# EAGLE board Qwiic EEPROM-Panel (EAGLE 9.6.2), part 1 of 4
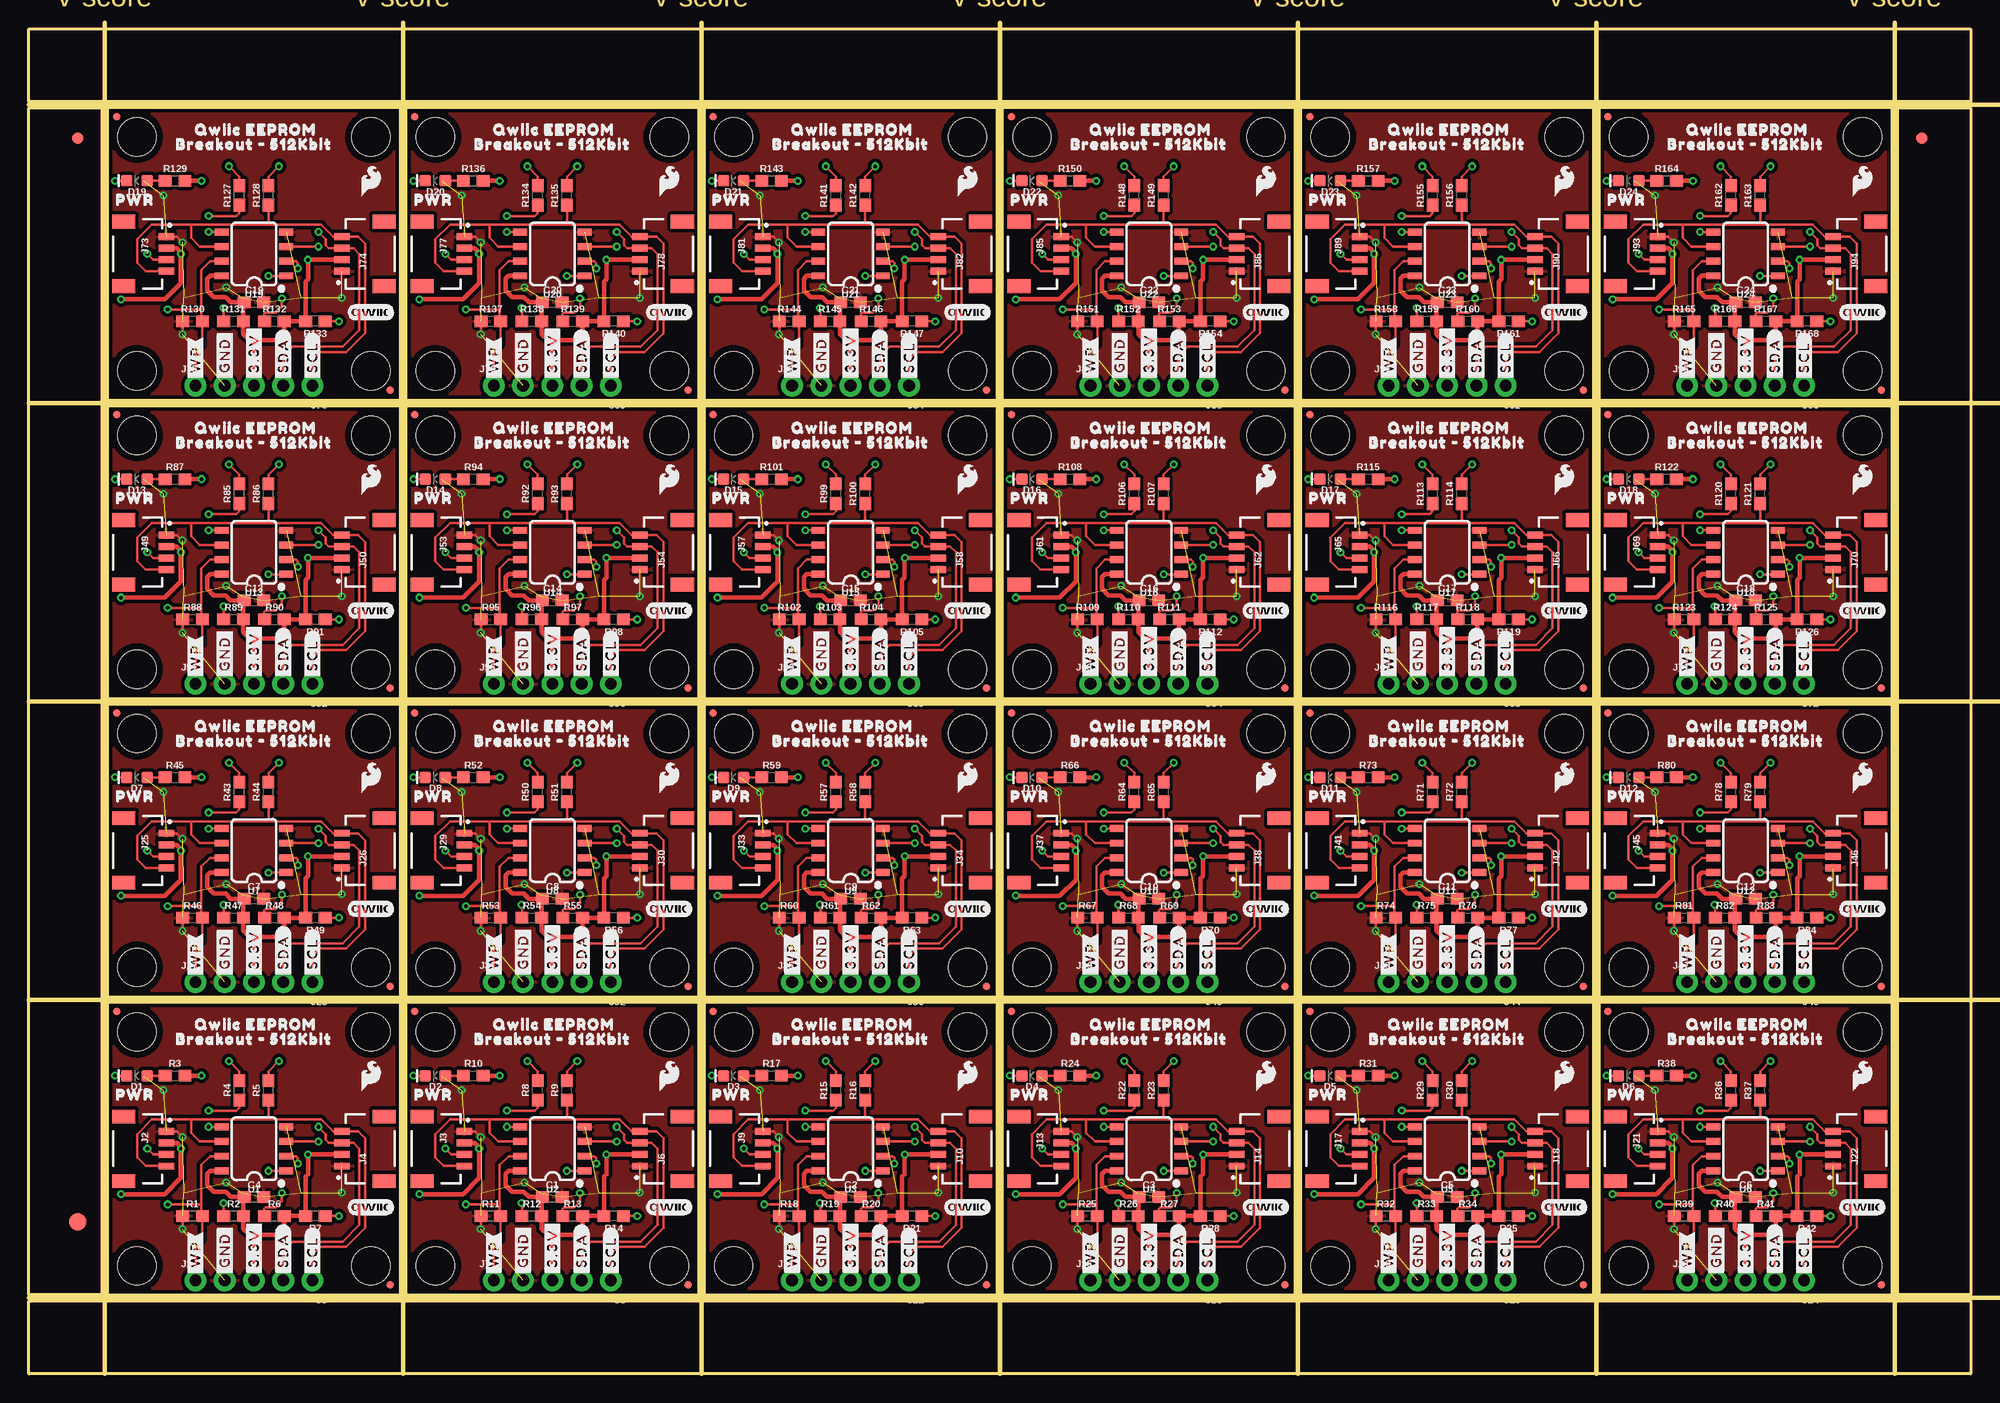
[diagram p0: board, top side]
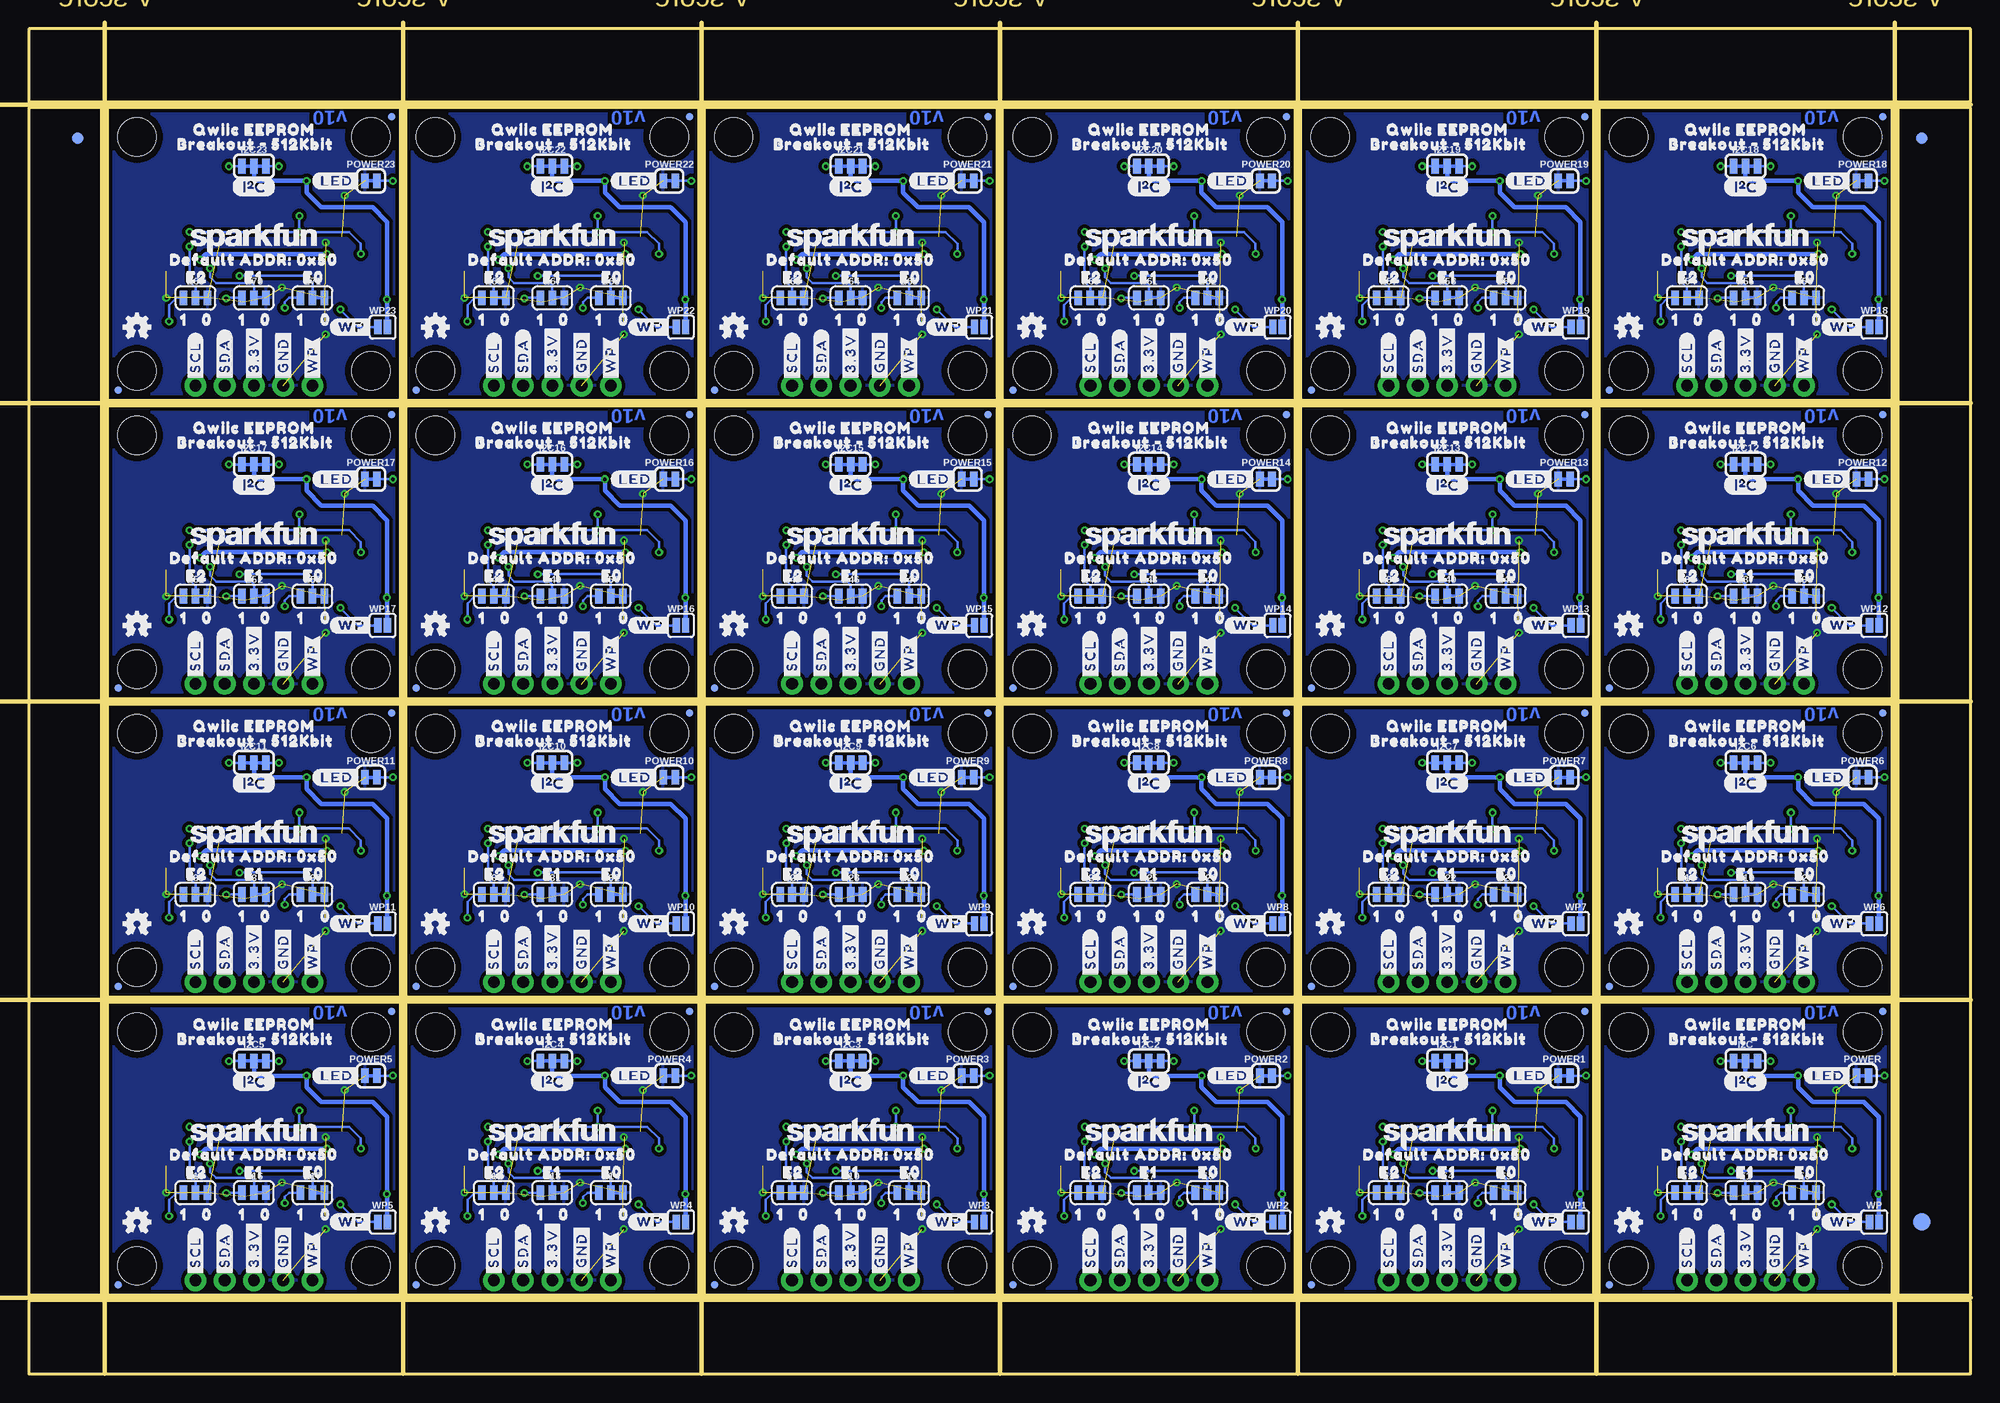
[diagram p1: board, bottom side, seen from below]

Size 168.66 x 116.84 mm. Coordinates in mm from the lower left corner, seen from the top.
Outline: 6.86,6.86 6.86,32.26 32.26,32.26 32.26,6.86 6.86,6.86
Outline: 32.77,6.86 32.77,32.26 58.17,32.26 58.17,6.86 32.77,6.86
Outline: 58.67,6.86 58.67,32.26 84.07,32.26 84.07,6.86 58.67,6.86
Outline: 84.58,6.86 84.58,32.26 109.98,32.26 109.98,6.86 84.58,6.86
Outline: 110.49,6.86 110.49,32.26 135.89,32.26 135.89,6.86 110.49,6.86
Outline: 136.4,6.86 136.4,32.26 161.8,32.26 161.8,6.86 136.4,6.86
Outline: 6.86,32.77 6.86,58.17 32.26,58.17 32.26,32.77 6.86,32.77
Outline: 32.77,32.77 32.77,58.17 58.17,58.17 58.17,32.77 32.77,32.77
Outline: 58.67,32.77 58.67,58.17 84.07,58.17 84.07,32.77 58.67,32.77
Outline: 84.58,32.77 84.58,58.17 109.98,58.17 109.98,32.77 84.58,32.77
Outline: 110.49,32.77 110.49,58.17 135.89,58.17 135.89,32.77 110.49,32.77
Outline: 136.4,32.77 136.4,58.17 161.8,58.17 161.8,32.77 136.4,32.77
Outline: 6.86,58.67 6.86,84.07 32.26,84.07 32.26,58.67 6.86,58.67
Outline: 32.77,58.67 32.77,84.07 58.17,84.07 58.17,58.67 32.77,58.67
Outline: 58.67,58.67 58.67,84.07 84.07,84.07 84.07,58.67 58.67,58.67
Outline: 84.58,58.67 84.58,84.07 109.98,84.07 109.98,58.67 84.58,58.67
Outline: 110.49,58.67 110.49,84.07 135.89,84.07 135.89,58.67 110.49,58.67
Outline: 136.4,58.67 136.4,84.07 161.8,84.07 161.8,58.67 136.4,58.67
Outline: 6.86,84.58 6.86,109.98 32.26,109.98 32.26,84.58 6.86,84.58
Outline: 32.77,84.58 32.77,109.98 58.17,109.98 58.17,84.58 32.77,84.58
Outline: 58.67,84.58 58.67,109.98 84.07,109.98 84.07,84.58 58.67,84.58
Outline: 84.58,84.58 84.58,109.98 109.98,109.98 109.98,84.58 84.58,84.58
Outline: 110.49,84.58 110.49,109.98 135.89,109.98 135.89,84.58 110.49,84.58
Outline: 136.4,84.58 136.4,109.98 161.8,109.98 161.8,84.58 136.4,84.58
Outline: 0,6.35 168.66,6.35 168.66,0 0,0 0,6.35
Outline: 162.31,109.98 168.66,109.98 168.66,6.86 162.31,6.86 162.31,109.98
Outline: 0,116.84 168.66,116.84 168.66,110.49 0,110.49 0,116.84
Outline: 0,109.98 6.35,109.98 6.35,6.86 0,6.86 0,109.98
Copper layers (1*16): Top 0.035mm / dielectric 1.5mm / Bottom 0.035mm
Design rules "Qwiic EEPROM": minimum track width 7mil, minimum drill 0.3mm, track to track 7mil, track to pad 7mil, pad to pad 7mil, via to via 7mil, smd to smd 7mil, copper to edge 7mil, drill to drill 7mil, minimum pad ring 7mil, minimum via ring 7mil, stop-mask expansion 3mil, vias tented up to drill 25mil, thermal gap 10mil
Milling: 12 lines

## Footprints (pad centres in the part's own frame; a part is rotated, then mirrored left to right if it is on the bottom)
0603 = smd 1.1 x 1: 1 -0.85,0; 2 0.85,0
LED-0603 = smd 1 x 1: A -0.877,0; C 0.877,0
SMT-JUMPER_3_1-NC_TRACE_SILK = smd 0.66 x 1.27: 1 -1.041,0; 2 0,0; 3 1.041,0
FIDUCIAL-1X2 = smd 1 x 1: 1 0,0
FIDUCIAL-1.5X3 = smd 1.5 x 1.5: 1 0,0
SMT-JUMPER_3_2-NC_TRACE_SILK = smd 0.66 x 1.27: 1 -1.041,0; 2 0,0; 3 1.041,0
1X01_NO_SILK = drill 1.016 pad 1.88: 1 0,0
JST04_1MM_RA = smd 0.6 x 1.35: 1 -1.5,0; 2 -0.5,0; 3 0.5,0; 4 1.5,0 | smd 1.2 x 2: NC1 2.8,-3.675; NC2 -2.8,-3.675
1X04_NO_SILK = drill 1.016 pad 1.88: 1 0,0; 2 2.54,0; 3 5.08,0; 4 7.62,0
FIDUCIAL-MICRO = smd 0.635 x 0.635: 1 0,0
STAND-OFF = hole 3.302: 0,0
SMT-JUMPER_2_NC_TRACE_SILK = smd 0.66 x 1.27: 1 -0.521,0; 2 0.521,0
SO08 = smd 0.6 x 1.2: 1 -1.905,-2.8; 2 -0.635,-2.8; 3 0.635,-2.8; 4 1.905,-2.8; 5 1.905,2.8; 6 0.635,2.8; 7 -0.635,2.8; 8 -1.905,2.8
SMT-JUMPER_2_NO_SILK = smd 0.635 x 1.27: 1 -0.406,0; 2 0.406,0

## Placement (x,y rotation side)
C1  0.1uF  [0603]  45.47,15.37 0 top
C2  0.1uF  [0603]  71.37,15.37 0 top
C3  0.1uF  [0603]  97.28,15.37 0 top
C4  0.1uF  [0603]  19.56,15.37 0 top
C5  0.1uF  [0603]  123.19,15.37 0 top
C6  0.1uF  [0603]  149.1,15.37 0 top
C7  0.1uF  [0603]  19.56,41.27 0 top
C8  0.1uF  [0603]  45.47,41.27 0 top
C9  0.1uF  [0603]  71.37,41.27 0 top
C10  0.1uF  [0603]  97.28,41.27 0 top
C11  0.1uF  [0603]  123.19,41.27 0 top
C12  0.1uF  [0603]  149.1,41.27 0 top
C13  0.1uF  [0603]  19.56,67.18 0 top
C14  0.1uF  [0603]  45.47,67.18 0 top
C15  0.1uF  [0603]  71.37,67.18 0 top
C16  0.1uF  [0603]  97.28,67.18 0 top
C17  0.1uF  [0603]  123.19,67.18 0 top
C18  0.1uF  [0603]  149.1,67.18 0 top
C19  0.1uF  [0603]  19.56,93.09 0 top
C20  0.1uF  [0603]  45.47,93.09 0 top
C21  0.1uF  [0603]  71.37,93.09 0 top
C22  0.1uF  [0603]  97.28,93.09 0 top
C23  0.1uF  [0603]  123.19,93.09 0 top
C24  0.1uF  [0603]  149.1,93.09 0 top
D1  RED  [LED-0603]  9.4,25.91 180 top
D2  RED  [LED-0603]  35.31,25.91 180 top
D3  RED  [LED-0603]  61.21,25.91 180 top
D4  RED  [LED-0603]  87.12,25.91 180 top
D5  RED  [LED-0603]  113.03,25.91 180 top
D6  RED  [LED-0603]  138.94,25.91 180 top
D7  RED  [LED-0603]  9.4,51.82 180 top
D8  RED  [LED-0603]  35.31,51.82 180 top
D9  RED  [LED-0603]  61.21,51.82 180 top
D10  RED  [LED-0603]  87.12,51.82 180 top
D11  RED  [LED-0603]  113.03,51.82 180 top
D12  RED  [LED-0603]  138.94,51.82 180 top
D13  RED  [LED-0603]  9.4,77.72 180 top
D14  RED  [LED-0603]  35.31,77.72 180 top
D15  RED  [LED-0603]  61.21,77.72 180 top
D16  RED  [LED-0603]  87.12,77.72 180 top
D17  RED  [LED-0603]  113.03,77.72 180 top
D18  RED  [LED-0603]  138.94,77.72 180 top
D19  RED  [LED-0603]  9.4,103.63 180 top
D20  RED  [LED-0603]  35.31,103.63 180 top
D21  RED  [LED-0603]  61.21,103.63 180 top
D22  RED  [LED-0603]  87.12,103.63 180 top
D23  RED  [LED-0603]  113.03,103.63 180 top
D24  RED  [LED-0603]  138.94,103.63 180 top
E0  JUMPER-SMT_3_1-NC_TRACE_SILK  [SMT-JUMPER_3_1-NC_TRACE_SILK]  14.48,15.75 0 bottom
E1  JUMPER-SMT_3_1-NC_TRACE_SILK  [SMT-JUMPER_3_1-NC_TRACE_SILK]  19.56,15.75 0 bottom
E2  JUMPER-SMT_3_1-NC_TRACE_SILK  [SMT-JUMPER_3_1-NC_TRACE_SILK]  24.64,15.75 0 bottom
E3  JUMPER-SMT_3_1-NC_TRACE_SILK  [SMT-JUMPER_3_1-NC_TRACE_SILK]  50.55,15.75 0 bottom
E4  JUMPER-SMT_3_1-NC_TRACE_SILK  [SMT-JUMPER_3_1-NC_TRACE_SILK]  45.47,15.75 0 bottom
E5  JUMPER-SMT_3_1-NC_TRACE_SILK  [SMT-JUMPER_3_1-NC_TRACE_SILK]  40.39,15.75 0 bottom
E6  JUMPER-SMT_3_1-NC_TRACE_SILK  [SMT-JUMPER_3_1-NC_TRACE_SILK]  76.45,15.75 0 bottom
E7  JUMPER-SMT_3_1-NC_TRACE_SILK  [SMT-JUMPER_3_1-NC_TRACE_SILK]  71.37,15.75 0 bottom
E8  JUMPER-SMT_3_1-NC_TRACE_SILK  [SMT-JUMPER_3_1-NC_TRACE_SILK]  66.29,15.75 0 bottom
E9  JUMPER-SMT_3_1-NC_TRACE_SILK  [SMT-JUMPER_3_1-NC_TRACE_SILK]  102.36,15.75 0 bottom
E10  JUMPER-SMT_3_1-NC_TRACE_SILK  [SMT-JUMPER_3_1-NC_TRACE_SILK]  97.28,15.75 0 bottom
E11  JUMPER-SMT_3_1-NC_TRACE_SILK  [SMT-JUMPER_3_1-NC_TRACE_SILK]  92.2,15.75 0 bottom
E12  JUMPER-SMT_3_1-NC_TRACE_SILK  [SMT-JUMPER_3_1-NC_TRACE_SILK]  128.27,15.75 0 bottom
E13  JUMPER-SMT_3_1-NC_TRACE_SILK  [SMT-JUMPER_3_1-NC_TRACE_SILK]  123.19,15.75 0 bottom
E14  JUMPER-SMT_3_1-NC_TRACE_SILK  [SMT-JUMPER_3_1-NC_TRACE_SILK]  118.11,15.75 0 bottom
E15  JUMPER-SMT_3_1-NC_TRACE_SILK  [SMT-JUMPER_3_1-NC_TRACE_SILK]  154.18,15.75 0 bottom
E16  JUMPER-SMT_3_1-NC_TRACE_SILK  [SMT-JUMPER_3_1-NC_TRACE_SILK]  149.1,15.75 0 bottom
E17  JUMPER-SMT_3_1-NC_TRACE_SILK  [SMT-JUMPER_3_1-NC_TRACE_SILK]  144.02,15.75 0 bottom
E18  JUMPER-SMT_3_1-NC_TRACE_SILK  [SMT-JUMPER_3_1-NC_TRACE_SILK]  24.64,41.66 0 bottom
E19  JUMPER-SMT_3_1-NC_TRACE_SILK  [SMT-JUMPER_3_1-NC_TRACE_SILK]  19.56,41.66 0 bottom
E20  JUMPER-SMT_3_1-NC_TRACE_SILK  [SMT-JUMPER_3_1-NC_TRACE_SILK]  14.48,41.66 0 bottom
E21  JUMPER-SMT_3_1-NC_TRACE_SILK  [SMT-JUMPER_3_1-NC_TRACE_SILK]  50.55,41.66 0 bottom
E22  JUMPER-SMT_3_1-NC_TRACE_SILK  [SMT-JUMPER_3_1-NC_TRACE_SILK]  45.47,41.66 0 bottom
E23  JUMPER-SMT_3_1-NC_TRACE_SILK  [SMT-JUMPER_3_1-NC_TRACE_SILK]  40.39,41.66 0 bottom
E24  JUMPER-SMT_3_1-NC_TRACE_SILK  [SMT-JUMPER_3_1-NC_TRACE_SILK]  76.45,41.66 0 bottom
E25  JUMPER-SMT_3_1-NC_TRACE_SILK  [SMT-JUMPER_3_1-NC_TRACE_SILK]  71.37,41.66 0 bottom
E26  JUMPER-SMT_3_1-NC_TRACE_SILK  [SMT-JUMPER_3_1-NC_TRACE_SILK]  66.29,41.66 0 bottom
E27  JUMPER-SMT_3_1-NC_TRACE_SILK  [SMT-JUMPER_3_1-NC_TRACE_SILK]  102.36,41.66 0 bottom
E28  JUMPER-SMT_3_1-NC_TRACE_SILK  [SMT-JUMPER_3_1-NC_TRACE_SILK]  97.28,41.66 0 bottom
E29  JUMPER-SMT_3_1-NC_TRACE_SILK  [SMT-JUMPER_3_1-NC_TRACE_SILK]  92.2,41.66 0 bottom
E30  JUMPER-SMT_3_1-NC_TRACE_SILK  [SMT-JUMPER_3_1-NC_TRACE_SILK]  128.27,41.66 0 bottom
E31  JUMPER-SMT_3_1-NC_TRACE_SILK  [SMT-JUMPER_3_1-NC_TRACE_SILK]  123.19,41.66 0 bottom
E32  JUMPER-SMT_3_1-NC_TRACE_SILK  [SMT-JUMPER_3_1-NC_TRACE_SILK]  118.11,41.66 0 bottom
E33  JUMPER-SMT_3_1-NC_TRACE_SILK  [SMT-JUMPER_3_1-NC_TRACE_SILK]  154.18,41.66 0 bottom
E34  JUMPER-SMT_3_1-NC_TRACE_SILK  [SMT-JUMPER_3_1-NC_TRACE_SILK]  149.1,41.66 0 bottom
E35  JUMPER-SMT_3_1-NC_TRACE_SILK  [SMT-JUMPER_3_1-NC_TRACE_SILK]  144.02,41.66 0 bottom
E36  JUMPER-SMT_3_1-NC_TRACE_SILK  [SMT-JUMPER_3_1-NC_TRACE_SILK]  24.64,67.56 0 bottom
E37  JUMPER-SMT_3_1-NC_TRACE_SILK  [SMT-JUMPER_3_1-NC_TRACE_SILK]  19.56,67.56 0 bottom
E38  JUMPER-SMT_3_1-NC_TRACE_SILK  [SMT-JUMPER_3_1-NC_TRACE_SILK]  14.48,67.56 0 bottom
E39  JUMPER-SMT_3_1-NC_TRACE_SILK  [SMT-JUMPER_3_1-NC_TRACE_SILK]  50.55,67.56 0 bottom
E40  JUMPER-SMT_3_1-NC_TRACE_SILK  [SMT-JUMPER_3_1-NC_TRACE_SILK]  45.47,67.56 0 bottom
E41  JUMPER-SMT_3_1-NC_TRACE_SILK  [SMT-JUMPER_3_1-NC_TRACE_SILK]  40.39,67.56 0 bottom
E42  JUMPER-SMT_3_1-NC_TRACE_SILK  [SMT-JUMPER_3_1-NC_TRACE_SILK]  76.45,67.56 0 bottom
E43  JUMPER-SMT_3_1-NC_TRACE_SILK  [SMT-JUMPER_3_1-NC_TRACE_SILK]  71.37,67.56 0 bottom
E44  JUMPER-SMT_3_1-NC_TRACE_SILK  [SMT-JUMPER_3_1-NC_TRACE_SILK]  66.29,67.56 0 bottom
E45  JUMPER-SMT_3_1-NC_TRACE_SILK  [SMT-JUMPER_3_1-NC_TRACE_SILK]  102.36,67.56 0 bottom
E46  JUMPER-SMT_3_1-NC_TRACE_SILK  [SMT-JUMPER_3_1-NC_TRACE_SILK]  97.28,67.56 0 bottom
E47  JUMPER-SMT_3_1-NC_TRACE_SILK  [SMT-JUMPER_3_1-NC_TRACE_SILK]  92.2,67.56 0 bottom
E48  JUMPER-SMT_3_1-NC_TRACE_SILK  [SMT-JUMPER_3_1-NC_TRACE_SILK]  128.27,67.56 0 bottom
E49  JUMPER-SMT_3_1-NC_TRACE_SILK  [SMT-JUMPER_3_1-NC_TRACE_SILK]  123.19,67.56 0 bottom
E50  JUMPER-SMT_3_1-NC_TRACE_SILK  [SMT-JUMPER_3_1-NC_TRACE_SILK]  118.11,67.56 0 bottom
E51  JUMPER-SMT_3_1-NC_TRACE_SILK  [SMT-JUMPER_3_1-NC_TRACE_SILK]  154.18,67.56 0 bottom
E52  JUMPER-SMT_3_1-NC_TRACE_SILK  [SMT-JUMPER_3_1-NC_TRACE_SILK]  149.1,67.56 0 bottom
E53  JUMPER-SMT_3_1-NC_TRACE_SILK  [SMT-JUMPER_3_1-NC_TRACE_SILK]  144.02,67.56 0 bottom
E54  JUMPER-SMT_3_1-NC_TRACE_SILK  [SMT-JUMPER_3_1-NC_TRACE_SILK]  24.64,93.47 0 bottom
E55  JUMPER-SMT_3_1-NC_TRACE_SILK  [SMT-JUMPER_3_1-NC_TRACE_SILK]  19.56,93.47 0 bottom
E56  JUMPER-SMT_3_1-NC_TRACE_SILK  [SMT-JUMPER_3_1-NC_TRACE_SILK]  14.48,93.47 0 bottom
E57  JUMPER-SMT_3_1-NC_TRACE_SILK  [SMT-JUMPER_3_1-NC_TRACE_SILK]  50.55,93.47 0 bottom
E58  JUMPER-SMT_3_1-NC_TRACE_SILK  [SMT-JUMPER_3_1-NC_TRACE_SILK]  45.47,93.47 0 bottom
E59  JUMPER-SMT_3_1-NC_TRACE_SILK  [SMT-JUMPER_3_1-NC_TRACE_SILK]  40.39,93.47 0 bottom
E60  JUMPER-SMT_3_1-NC_TRACE_SILK  [SMT-JUMPER_3_1-NC_TRACE_SILK]  76.45,93.47 0 bottom
E61  JUMPER-SMT_3_1-NC_TRACE_SILK  [SMT-JUMPER_3_1-NC_TRACE_SILK]  71.37,93.47 0 bottom
E62  JUMPER-SMT_3_1-NC_TRACE_SILK  [SMT-JUMPER_3_1-NC_TRACE_SILK]  66.29,93.47 0 bottom
E63  JUMPER-SMT_3_1-NC_TRACE_SILK  [SMT-JUMPER_3_1-NC_TRACE_SILK]  102.36,93.47 0 bottom
E64  JUMPER-SMT_3_1-NC_TRACE_SILK  [SMT-JUMPER_3_1-NC_TRACE_SILK]  97.28,93.47 0 bottom
E65  JUMPER-SMT_3_1-NC_TRACE_SILK  [SMT-JUMPER_3_1-NC_TRACE_SILK]  92.2,93.47 0 bottom
E66  JUMPER-SMT_3_1-NC_TRACE_SILK  [SMT-JUMPER_3_1-NC_TRACE_SILK]  128.27,93.47 0 bottom
E67  JUMPER-SMT_3_1-NC_TRACE_SILK  [SMT-JUMPER_3_1-NC_TRACE_SILK]  123.19,93.47 0 bottom
E68  JUMPER-SMT_3_1-NC_TRACE_SILK  [SMT-JUMPER_3_1-NC_TRACE_SILK]  118.11,93.47 0 bottom
E69  JUMPER-SMT_3_1-NC_TRACE_SILK  [SMT-JUMPER_3_1-NC_TRACE_SILK]  154.18,93.47 0 bottom
E70  JUMPER-SMT_3_1-NC_TRACE_SILK  [SMT-JUMPER_3_1-NC_TRACE_SILK]  149.1,93.47 0 bottom
E71  JUMPER-SMT_3_1-NC_TRACE_SILK  [SMT-JUMPER_3_1-NC_TRACE_SILK]  144.02,93.47 0 bottom
E$1  [FIDUCIAL-1X2]  4.23,107.31 0 top
E$2  [FIDUCIAL-1X2]  4.23,107.31 0 bottom
E$3  [FIDUCIAL-1X2]  164.42,107.31 0 top
E$4  [FIDUCIAL-1X2]  164.42,107.31 0 bottom
E$5  [FIDUCIAL-1.5X3]  4.23,13.21 0 top
E$6  [FIDUCIAL-1.5X3]  4.23,13.21 0 bottom
I2C  JUMPER-SMT_3_2-NC_TRACE_SILK  [SMT-JUMPER_3_2-NC_TRACE_SILK]  19.56,27.18 0 bottom
I2C1  JUMPER-SMT_3_2-NC_TRACE_SILK  [SMT-JUMPER_3_2-NC_TRACE_SILK]  45.47,27.18 0 bottom
I2C2  JUMPER-SMT_3_2-NC_TRACE_SILK  [SMT-JUMPER_3_2-NC_TRACE_SILK]  71.37,27.18 0 bottom
I2C3  JUMPER-SMT_3_2-NC_TRACE_SILK  [SMT-JUMPER_3_2-NC_TRACE_SILK]  97.28,27.18 0 bottom
I2C4  JUMPER-SMT_3_2-NC_TRACE_SILK  [SMT-JUMPER_3_2-NC_TRACE_SILK]  123.19,27.18 0 bottom
I2C5  JUMPER-SMT_3_2-NC_TRACE_SILK  [SMT-JUMPER_3_2-NC_TRACE_SILK]  149.1,27.18 0 bottom
I2C6  JUMPER-SMT_3_2-NC_TRACE_SILK  [SMT-JUMPER_3_2-NC_TRACE_SILK]  19.56,53.09 0 bottom
I2C7  JUMPER-SMT_3_2-NC_TRACE_SILK  [SMT-JUMPER_3_2-NC_TRACE_SILK]  45.47,53.09 0 bottom
I2C8  JUMPER-SMT_3_2-NC_TRACE_SILK  [SMT-JUMPER_3_2-NC_TRACE_SILK]  71.37,53.09 0 bottom
I2C9  JUMPER-SMT_3_2-NC_TRACE_SILK  [SMT-JUMPER_3_2-NC_TRACE_SILK]  97.28,53.09 0 bottom
I2C10  JUMPER-SMT_3_2-NC_TRACE_SILK  [SMT-JUMPER_3_2-NC_TRACE_SILK]  123.19,53.09 0 bottom
I2C11  JUMPER-SMT_3_2-NC_TRACE_SILK  [SMT-JUMPER_3_2-NC_TRACE_SILK]  149.1,53.09 0 bottom
I2C12  JUMPER-SMT_3_2-NC_TRACE_SILK  [SMT-JUMPER_3_2-NC_TRACE_SILK]  19.56,78.99 0 bottom
I2C13  JUMPER-SMT_3_2-NC_TRACE_SILK  [SMT-JUMPER_3_2-NC_TRACE_SILK]  45.47,78.99 0 bottom
I2C14  JUMPER-SMT_3_2-NC_TRACE_SILK  [SMT-JUMPER_3_2-NC_TRACE_SILK]  71.37,78.99 0 bottom
I2C15  JUMPER-SMT_3_2-NC_TRACE_SILK  [SMT-JUMPER_3_2-NC_TRACE_SILK]  97.28,78.99 0 bottom
I2C16  JUMPER-SMT_3_2-NC_TRACE_SILK  [SMT-JUMPER_3_2-NC_TRACE_SILK]  123.19,78.99 0 bottom
I2C17  JUMPER-SMT_3_2-NC_TRACE_SILK  [SMT-JUMPER_3_2-NC_TRACE_SILK]  149.1,78.99 0 bottom
I2C18  JUMPER-SMT_3_2-NC_TRACE_SILK  [SMT-JUMPER_3_2-NC_TRACE_SILK]  19.56,104.9 0 bottom
I2C19  JUMPER-SMT_3_2-NC_TRACE_SILK  [SMT-JUMPER_3_2-NC_TRACE_SILK]  45.47,104.9 0 bottom
I2C20  JUMPER-SMT_3_2-NC_TRACE_SILK  [SMT-JUMPER_3_2-NC_TRACE_SILK]  71.37,104.9 0 bottom
I2C21  JUMPER-SMT_3_2-NC_TRACE_SILK  [SMT-JUMPER_3_2-NC_TRACE_SILK]  97.28,104.9 0 bottom
I2C22  JUMPER-SMT_3_2-NC_TRACE_SILK  [SMT-JUMPER_3_2-NC_TRACE_SILK]  123.19,104.9 0 bottom
I2C23  JUMPER-SMT_3_2-NC_TRACE_SILK  [SMT-JUMPER_3_2-NC_TRACE_SILK]  149.1,104.9 0 bottom
J1  [1X01_NO_SILK]  14.48,8.13 0 top
J2  QWIIC_RA  [JST04_1MM_RA]  11.94,19.56 270 top
J3  QWIIC_RA  [JST04_1MM_RA]  37.85,19.56 270 top
J4  QWIIC_RA  [JST04_1MM_RA]  27.18,19.56 90 top
J5  [1X04_NO_SILK]  24.64,8.13 180 top
J6  QWIIC_RA  [JST04_1MM_RA]  53.09,19.56 90 top
J7  [1X01_NO_SILK]  40.39,8.13 0 top
J8  [1X04_NO_SILK]  50.55,8.13 180 top
J9  QWIIC_RA  [JST04_1MM_RA]  63.75,19.56 270 top
J10  QWIIC_RA  [JST04_1MM_RA]  78.99,19.56 90 top
J11  [1X01_NO_SILK]  66.29,8.13 0 top
J12  [1X04_NO_SILK]  76.45,8.13 180 top
J13  QWIIC_RA  [JST04_1MM_RA]  89.66,19.56 270 top
J14  QWIIC_RA  [JST04_1MM_RA]  104.9,19.56 90 top
J15  [1X01_NO_SILK]  92.2,8.13 0 top
J16  [1X04_NO_SILK]  102.36,8.13 180 top
J17  QWIIC_RA  [JST04_1MM_RA]  115.57,19.56 270 top
J18  QWIIC_RA  [JST04_1MM_RA]  130.81,19.56 90 top
J19  [1X01_NO_SILK]  118.11,8.13 0 top
J20  [1X04_NO_SILK]  128.27,8.13 180 top
J21  QWIIC_RA  [JST04_1MM_RA]  141.48,19.56 270 top
J22  QWIIC_RA  [JST04_1MM_RA]  156.72,19.56 90 top
J23  [1X01_NO_SILK]  144.02,8.13 0 top
J24  [1X04_NO_SILK]  154.18,8.13 180 top
J25  QWIIC_RA  [JST04_1MM_RA]  11.94,45.47 270 top
J26  QWIIC_RA  [JST04_1MM_RA]  27.18,45.47 90 top
J27  [1X01_NO_SILK]  14.48,34.04 0 top
J28  [1X04_NO_SILK]  24.64,34.04 180 top
J29  QWIIC_RA  [JST04_1MM_RA]  37.85,45.47 270 top
J30  QWIIC_RA  [JST04_1MM_RA]  53.09,45.47 90 top
J31  [1X01_NO_SILK]  40.39,34.04 0 top
J32  [1X04_NO_SILK]  50.55,34.04 180 top
J33  QWIIC_RA  [JST04_1MM_RA]  63.75,45.47 270 top
J34  QWIIC_RA  [JST04_1MM_RA]  78.99,45.47 90 top
J35  [1X01_NO_SILK]  66.29,34.04 0 top
J36  [1X04_NO_SILK]  76.45,34.04 180 top
J37  QWIIC_RA  [JST04_1MM_RA]  89.66,45.47 270 top
J38  QWIIC_RA  [JST04_1MM_RA]  104.9,45.47 90 top
J39  [1X01_NO_SILK]  92.2,34.04 0 top
J40  [1X04_NO_SILK]  102.36,34.04 180 top
J41  QWIIC_RA  [JST04_1MM_RA]  115.57,45.47 270 top
J42  QWIIC_RA  [JST04_1MM_RA]  130.81,45.47 90 top
J43  [1X01_NO_SILK]  118.11,34.04 0 top
J44  [1X04_NO_SILK]  128.27,34.04 180 top
J45  QWIIC_RA  [JST04_1MM_RA]  141.48,45.47 270 top
J46  QWIIC_RA  [JST04_1MM_RA]  156.72,45.47 90 top
J47  [1X01_NO_SILK]  144.02,34.04 0 top
J48  [1X04_NO_SILK]  154.18,34.04 180 top
J49  QWIIC_RA  [JST04_1MM_RA]  11.94,71.37 270 top
J50  QWIIC_RA  [JST04_1MM_RA]  27.18,71.37 90 top
J51  [1X01_NO_SILK]  14.48,59.94 0 top
J52  [1X04_NO_SILK]  24.64,59.94 180 top
J53  QWIIC_RA  [JST04_1MM_RA]  37.85,71.37 270 top
J54  QWIIC_RA  [JST04_1MM_RA]  53.09,71.37 90 top
J55  [1X01_NO_SILK]  40.39,59.94 0 top
J56  [1X04_NO_SILK]  50.55,59.94 180 top
J57  QWIIC_RA  [JST04_1MM_RA]  63.75,71.37 270 top
J58  QWIIC_RA  [JST04_1MM_RA]  78.99,71.37 90 top
J59  [1X01_NO_SILK]  66.29,59.94 0 top
J60  [1X04_NO_SILK]  76.45,59.94 180 top
J61  QWIIC_RA  [JST04_1MM_RA]  89.66,71.37 270 top
J62  QWIIC_RA  [JST04_1MM_RA]  104.9,71.37 90 top
J63  [1X01_NO_SILK]  92.2,59.94 0 top
J64  [1X04_NO_SILK]  102.36,59.94 180 top
J65  QWIIC_RA  [JST04_1MM_RA]  115.57,71.37 270 top
J66  QWIIC_RA  [JST04_1MM_RA]  130.81,71.37 90 top
J67  [1X01_NO_SILK]  118.11,59.94 0 top
J68  [1X04_NO_SILK]  128.27,59.94 180 top
J69  QWIIC_RA  [JST04_1MM_RA]  141.48,71.37 270 top
J70  QWIIC_RA  [JST04_1MM_RA]  156.72,71.37 90 top
J71  [1X01_NO_SILK]  144.02,59.94 0 top
J72  [1X04_NO_SILK]  154.18,59.94 180 top
J73  QWIIC_RA  [JST04_1MM_RA]  11.94,97.28 270 top
J74  QWIIC_RA  [JST04_1MM_RA]  27.18,97.28 90 top
J75  [1X01_NO_SILK]  14.48,85.85 0 top
J76  [1X04_NO_SILK]  24.64,85.85 180 top
J77  QWIIC_RA  [JST04_1MM_RA]  37.85,97.28 270 top
J78  QWIIC_RA  [JST04_1MM_RA]  53.09,97.28 90 top
J79  [1X01_NO_SILK]  40.39,85.85 0 top
J80  [1X04_NO_SILK]  50.55,85.85 180 top
J81  QWIIC_RA  [JST04_1MM_RA]  63.75,97.28 270 top
J82  QWIIC_RA  [JST04_1MM_RA]  78.99,97.28 90 top
J83  [1X01_NO_SILK]  66.29,85.85 0 top
J84  [1X04_NO_SILK]  76.45,85.85 180 top
J85  QWIIC_RA  [JST04_1MM_RA]  89.66,97.28 270 top
J86  QWIIC_RA  [JST04_1MM_RA]  104.9,97.28 90 top
J87  [1X01_NO_SILK]  92.2,85.85 0 top
J88  [1X04_NO_SILK]  102.36,85.85 180 top
J89  QWIIC_RA  [JST04_1MM_RA]  115.57,97.28 270 top
J90  QWIIC_RA  [JST04_1MM_RA]  130.81,97.28 90 top
J91  [1X01_NO_SILK]  118.11,85.85 0 top
J92  [1X04_NO_SILK]  128.27,85.85 180 top
J93  QWIIC_RA  [JST04_1MM_RA]  141.48,97.28 270 top
J94  QWIIC_RA  [JST04_1MM_RA]  156.72,97.28 90 top
J95  [1X01_NO_SILK]  144.02,85.85 0 top
J96  [1X04_NO_SILK]  154.18,85.85 180 top
JP1  FIDUCIALUFIDUCIAL  [FIDUCIAL-MICRO]  7.62,31.5 0 bottom
JP2  FIDUCIALUFIDUCIAL  [FIDUCIAL-MICRO]  31.37,7.75 0 top
JP3  STAND-OFF  [STAND-OFF]  9.4,29.72 0 top
JP4  STAND-OFF  [STAND-OFF]  29.72,29.72 0 top
JP5  FIDUCIALUFIDUCIAL  [FIDUCIAL-MICRO]  31.37,7.75 0 bottom
JP6  FIDUCIALUFIDUCIAL  [FIDUCIAL-MICRO]  7.62,31.5 0 top
JP7  STAND-OFF  [STAND-OFF]  9.4,9.4 0 top
JP8  STAND-OFF  [STAND-OFF]  29.72,9.4 0 top
JP9  STAND-OFF  [STAND-OFF]  35.31,29.72 0 top
JP10  STAND-OFF  [STAND-OFF]  55.63,29.72 0 top
JP11  FIDUCIALUFIDUCIAL  [FIDUCIAL-MICRO]  57.28,7.75 0 top
JP12  FIDUCIALUFIDUCIAL  [FIDUCIAL-MICRO]  33.53,31.5 0 top
JP13  FIDUCIALUFIDUCIAL  [FIDUCIAL-MICRO]  33.53,31.5 0 bottom
JP14  FIDUCIALUFIDUCIAL  [FIDUCIAL-MICRO]  57.28,7.75 0 bottom
JP15  STAND-OFF  [STAND-OFF]  35.31,9.4 0 top
JP16  STAND-OFF  [STAND-OFF]  55.63,9.4 0 top
JP17  STAND-OFF  [STAND-OFF]  61.21,29.72 0 top
JP18  STAND-OFF  [STAND-OFF]  81.53,29.72 0 top
JP19  FIDUCIALUFIDUCIAL  [FIDUCIAL-MICRO]  83.19,7.75 0 top
JP20  FIDUCIALUFIDUCIAL  [FIDUCIAL-MICRO]  59.44,31.5 0 top
JP21  FIDUCIALUFIDUCIAL  [FIDUCIAL-MICRO]  59.44,31.5 0 bottom
JP22  FIDUCIALUFIDUCIAL  [FIDUCIAL-MICRO]  83.19,7.75 0 bottom
JP23  STAND-OFF  [STAND-OFF]  61.21,9.4 0 top
JP24  STAND-OFF  [STAND-OFF]  81.53,9.4 0 top
JP25  STAND-OFF  [STAND-OFF]  87.12,29.72 0 top
JP26  STAND-OFF  [STAND-OFF]  107.44,29.72 0 top
JP27  FIDUCIALUFIDUCIAL  [FIDUCIAL-MICRO]  109.09,7.75 0 top
JP28  FIDUCIALUFIDUCIAL  [FIDUCIAL-MICRO]  85.34,31.5 0 top
JP29  FIDUCIALUFIDUCIAL  [FIDUCIAL-MICRO]  85.34,31.5 0 bottom
JP30  FIDUCIALUFIDUCIAL  [FIDUCIAL-MICRO]  109.09,7.75 0 bottom
JP31  STAND-OFF  [STAND-OFF]  87.12,9.4 0 top
JP32  STAND-OFF  [STAND-OFF]  107.44,9.4 0 top
JP33  STAND-OFF  [STAND-OFF]  113.03,29.72 0 top
JP34  STAND-OFF  [STAND-OFF]  133.35,29.72 0 top
JP35  FIDUCIALUFIDUCIAL  [FIDUCIAL-MICRO]  135,7.75 0 top
JP36  FIDUCIALUFIDUCIAL  [FIDUCIAL-MICRO]  111.25,31.5 0 top
JP37  FIDUCIALUFIDUCIAL  [FIDUCIAL-MICRO]  111.25,31.5 0 bottom
JP38  FIDUCIALUFIDUCIAL  [FIDUCIAL-MICRO]  135,7.75 0 bottom
JP39  STAND-OFF  [STAND-OFF]  113.03,9.4 0 top
JP40  STAND-OFF  [STAND-OFF]  133.35,9.4 0 top
JP41  STAND-OFF  [STAND-OFF]  138.94,29.72 0 top
JP42  STAND-OFF  [STAND-OFF]  159.26,29.72 0 top
JP43  FIDUCIALUFIDUCIAL  [FIDUCIAL-MICRO]  160.91,7.75 0 top
JP44  FIDUCIALUFIDUCIAL  [FIDUCIAL-MICRO]  137.16,31.5 0 top
JP45  FIDUCIALUFIDUCIAL  [FIDUCIAL-MICRO]  137.16,31.5 0 bottom
JP46  FIDUCIALUFIDUCIAL  [FIDUCIAL-MICRO]  160.91,7.75 0 bottom
JP47  STAND-OFF  [STAND-OFF]  138.94,9.4 0 top
JP48  STAND-OFF  [STAND-OFF]  159.26,9.4 0 top
JP49  STAND-OFF  [STAND-OFF]  9.4,55.63 0 top
JP50  STAND-OFF  [STAND-OFF]  29.72,55.63 0 top
JP51  FIDUCIALUFIDUCIAL  [FIDUCIAL-MICRO]  31.37,33.66 0 top
JP52  FIDUCIALUFIDUCIAL  [FIDUCIAL-MICRO]  7.62,57.4 0 top
JP53  FIDUCIALUFIDUCIAL  [FIDUCIAL-MICRO]  7.62,57.4 0 bottom
JP54  FIDUCIALUFIDUCIAL  [FIDUCIAL-MICRO]  31.37,33.66 0 bottom
JP55  STAND-OFF  [STAND-OFF]  9.4,35.31 0 top
JP56  STAND-OFF  [STAND-OFF]  29.72,35.31 0 top
JP57  STAND-OFF  [STAND-OFF]  35.31,55.63 0 top
JP58  STAND-OFF  [STAND-OFF]  55.63,55.63 0 top
JP59  FIDUCIALUFIDUCIAL  [FIDUCIAL-MICRO]  57.28,33.66 0 top
JP60  FIDUCIALUFIDUCIAL  [FIDUCIAL-MICRO]  33.53,57.4 0 top
JP61  FIDUCIALUFIDUCIAL  [FIDUCIAL-MICRO]  33.53,57.4 0 bottom
JP62  FIDUCIALUFIDUCIAL  [FIDUCIAL-MICRO]  57.28,33.66 0 bottom
JP63  STAND-OFF  [STAND-OFF]  35.31,35.31 0 top
JP64  STAND-OFF  [STAND-OFF]  55.63,35.31 0 top
JP65  STAND-OFF  [STAND-OFF]  61.21,55.63 0 top
JP66  STAND-OFF  [STAND-OFF]  81.53,55.63 0 top
JP67  FIDUCIALUFIDUCIAL  [FIDUCIAL-MICRO]  83.19,33.66 0 top
JP68  FIDUCIALUFIDUCIAL  [FIDUCIAL-MICRO]  59.44,57.4 0 top
JP69  FIDUCIALUFIDUCIAL  [FIDUCIAL-MICRO]  59.44,57.4 0 bottom
JP70  FIDUCIALUFIDUCIAL  [FIDUCIAL-MICRO]  83.19,33.66 0 bottom
JP71  STAND-OFF  [STAND-OFF]  61.21,35.31 0 top
JP72  STAND-OFF  [STAND-OFF]  81.53,35.31 0 top
JP73  STAND-OFF  [STAND-OFF]  87.12,55.63 0 top
JP74  STAND-OFF  [STAND-OFF]  107.44,55.63 0 top
JP75  FIDUCIALUFIDUCIAL  [FIDUCIAL-MICRO]  109.09,33.66 0 top
JP76  FIDUCIALUFIDUCIAL  [FIDUCIAL-MICRO]  85.34,57.4 0 top
JP77  FIDUCIALUFIDUCIAL  [FIDUCIAL-MICRO]  85.34,57.4 0 bottom
JP78  FIDUCIALUFIDUCIAL  [FIDUCIAL-MICRO]  109.09,33.66 0 bottom
JP79  STAND-OFF  [STAND-OFF]  87.12,35.31 0 top
JP80  STAND-OFF  [STAND-OFF]  107.44,35.31 0 top
JP81  STAND-OFF  [STAND-OFF]  113.03,55.63 0 top
JP82  STAND-OFF  [STAND-OFF]  133.35,55.63 0 top
JP83  FIDUCIALUFIDUCIAL  [FIDUCIAL-MICRO]  135,33.66 0 top
JP84  FIDUCIALUFIDUCIAL  [FIDUCIAL-MICRO]  111.25,57.4 0 top
JP85  FIDUCIALUFIDUCIAL  [FIDUCIAL-MICRO]  111.25,57.4 0 bottom
JP86  FIDUCIALUFIDUCIAL  [FIDUCIAL-MICRO]  135,33.66 0 bottom
JP87  STAND-OFF  [STAND-OFF]  113.03,35.31 0 top
JP88  STAND-OFF  [STAND-OFF]  133.35,35.31 0 top
JP89  STAND-OFF  [STAND-OFF]  138.94,55.63 0 top
JP90  STAND-OFF  [STAND-OFF]  159.26,55.63 0 top
JP91  FIDUCIALUFIDUCIAL  [FIDUCIAL-MICRO]  160.91,33.66 0 top
JP92  FIDUCIALUFIDUCIAL  [FIDUCIAL-MICRO]  137.16,57.4 0 top
JP93  FIDUCIALUFIDUCIAL  [FIDUCIAL-MICRO]  137.16,57.4 0 bottom
JP94  FIDUCIALUFIDUCIAL  [FIDUCIAL-MICRO]  160.91,33.66 0 bottom
JP95  STAND-OFF  [STAND-OFF]  138.94,35.31 0 top
JP96  STAND-OFF  [STAND-OFF]  159.26,35.31 0 top
JP97  STAND-OFF  [STAND-OFF]  9.4,81.53 0 top
JP98  STAND-OFF  [STAND-OFF]  29.72,81.53 0 top
JP99  FIDUCIALUFIDUCIAL  [FIDUCIAL-MICRO]  31.37,59.56 0 top
JP100  FIDUCIALUFIDUCIAL  [FIDUCIAL-MICRO]  7.62,83.31 0 top
JP101  FIDUCIALUFIDUCIAL  [FIDUCIAL-MICRO]  7.62,83.31 0 bottom
JP102  FIDUCIALUFIDUCIAL  [FIDUCIAL-MICRO]  31.37,59.56 0 bottom
JP103  STAND-OFF  [STAND-OFF]  9.4,61.21 0 top
JP104  STAND-OFF  [STAND-OFF]  29.72,61.21 0 top
JP105  STAND-OFF  [STAND-OFF]  35.31,81.53 0 top
JP106  STAND-OFF  [STAND-OFF]  55.63,81.53 0 top
JP107  FIDUCIALUFIDUCIAL  [FIDUCIAL-MICRO]  57.28,59.56 0 top
JP108  FIDUCIALUFIDUCIAL  [FIDUCIAL-MICRO]  33.53,83.31 0 top
JP109  FIDUCIALUFIDUCIAL  [FIDUCIAL-MICRO]  33.53,83.31 0 bottom
JP110  FIDUCIALUFIDUCIAL  [FIDUCIAL-MICRO]  57.28,59.56 0 bottom
JP111  STAND-OFF  [STAND-OFF]  35.31,61.21 0 top
JP112  STAND-OFF  [STAND-OFF]  55.63,61.21 0 top
JP113  STAND-OFF  [STAND-OFF]  61.21,81.53 0 top
JP114  STAND-OFF  [STAND-OFF]  81.53,81.53 0 top
JP115  FIDUCIALUFIDUCIAL  [FIDUCIAL-MICRO]  83.19,59.56 0 top
JP116  FIDUCIALUFIDUCIAL  [FIDUCIAL-MICRO]  59.44,83.31 0 top
JP117  FIDUCIALUFIDUCIAL  [FIDUCIAL-MICRO]  59.44,83.31 0 bottom
JP118  FIDUCIALUFIDUCIAL  [FIDUCIAL-MICRO]  83.19,59.56 0 bottom
JP119  STAND-OFF  [STAND-OFF]  61.21,61.21 0 top
JP120  STAND-OFF  [STAND-OFF]  81.53,61.21 0 top
JP121  STAND-OFF  [STAND-OFF]  87.12,81.53 0 top
JP122  STAND-OFF  [STAND-OFF]  107.44,81.53 0 top
JP123  FIDUCIALUFIDUCIAL  [FIDUCIAL-MICRO]  109.09,59.56 0 top
JP124  FIDUCIALUFIDUCIAL  [FIDUCIAL-MICRO]  85.34,83.31 0 top
JP125  FIDUCIALUFIDUCIAL  [FIDUCIAL-MICRO]  85.34,83.31 0 bottom
JP126  FIDUCIALUFIDUCIAL  [FIDUCIAL-MICRO]  109.09,59.56 0 bottom
JP127  STAND-OFF  [STAND-OFF]  87.12,61.21 0 top
JP128  STAND-OFF  [STAND-OFF]  107.44,61.21 0 top
JP129  STAND-OFF  [STAND-OFF]  113.03,81.53 0 top
JP130  STAND-OFF  [STAND-OFF]  133.35,81.53 0 top
JP131  FIDUCIALUFIDUCIAL  [FIDUCIAL-MICRO]  135,59.56 0 top
JP132  FIDUCIALUFIDUCIAL  [FIDUCIAL-MICRO]  111.25,83.31 0 top
JP133  FIDUCIALUFIDUCIAL  [FIDUCIAL-MICRO]  111.25,83.31 0 bottom
JP134  FIDUCIALUFIDUCIAL  [FIDUCIAL-MICRO]  135,59.56 0 bottom
JP135  STAND-OFF  [STAND-OFF]  113.03,61.21 0 top
JP136  STAND-OFF  [STAND-OFF]  133.35,61.21 0 top
JP137  STAND-OFF  [STAND-OFF]  138.94,81.53 0 top
JP138  STAND-OFF  [STAND-OFF]  159.26,81.53 0 top
JP139  FIDUCIALUFIDUCIAL  [FIDUCIAL-MICRO]  160.91,59.56 0 top
JP140  FIDUCIALUFIDUCIAL  [FIDUCIAL-MICRO]  137.16,83.31 0 top
JP141  FIDUCIALUFIDUCIAL  [FIDUCIAL-MICRO]  137.16,83.31 0 bottom
JP142  FIDUCIALUFIDUCIAL  [FIDUCIAL-MICRO]  160.91,59.56 0 bottom
JP143  STAND-OFF  [STAND-OFF]  138.94,61.21 0 top
JP144  STAND-OFF  [STAND-OFF]  159.26,61.21 0 top
JP145  STAND-OFF  [STAND-OFF]  9.4,107.44 0 top
JP146  STAND-OFF  [STAND-OFF]  29.72,107.44 0 top
JP147  FIDUCIALUFIDUCIAL  [FIDUCIAL-MICRO]  31.37,85.47 0 top
JP148  FIDUCIALUFIDUCIAL  [FIDUCIAL-MICRO]  7.62,109.22 0 top
JP149  FIDUCIALUFIDUCIAL  [FIDUCIAL-MICRO]  7.62,109.22 0 bottom
JP150  FIDUCIALUFIDUCIAL  [FIDUCIAL-MICRO]  31.37,85.47 0 bottom
JP151  STAND-OFF  [STAND-OFF]  9.4,87.12 0 top
JP152  STAND-OFF  [STAND-OFF]  29.72,87.12 0 top
JP153  STAND-OFF  [STAND-OFF]  35.31,107.44 0 top
JP154  STAND-OFF  [STAND-OFF]  55.63,107.44 0 top
JP155  FIDUCIALUFIDUCIAL  [FIDUCIAL-MICRO]  57.28,85.47 0 top
JP156  FIDUCIALUFIDUCIAL  [FIDUCIAL-MICRO]  33.53,109.22 0 top
JP157  FIDUCIALUFIDUCIAL  [FIDUCIAL-MICRO]  33.53,109.22 0 bottom
JP158  FIDUCIALUFIDUCIAL  [FIDUCIAL-MICRO]  57.28,85.47 0 bottom
JP159  STAND-OFF  [STAND-OFF]  35.31,87.12 0 top
JP160  STAND-OFF  [STAND-OFF]  55.63,87.12 0 top
JP161  STAND-OFF  [STAND-OFF]  61.21,107.44 0 top
JP162  STAND-OFF  [STAND-OFF]  81.53,107.44 0 top
JP163  FIDUCIALUFIDUCIAL  [FIDUCIAL-MICRO]  83.19,85.47 0 top
JP164  FIDUCIALUFIDUCIAL  [FIDUCIAL-MICRO]  59.44,109.22 0 top
JP165  FIDUCIALUFIDUCIAL  [FIDUCIAL-MICRO]  59.44,109.22 0 bottom
JP166  FIDUCIALUFIDUCIAL  [FIDUCIAL-MICRO]  83.19,85.47 0 bottom
JP167  STAND-OFF  [STAND-OFF]  61.21,87.12 0 top
JP168  STAND-OFF  [STAND-OFF]  81.53,87.12 0 top
JP169  STAND-OFF  [STAND-OFF]  87.12,107.44 0 top
JP170  STAND-OFF  [STAND-OFF]  107.44,107.44 0 top
JP171  FIDUCIALUFIDUCIAL  [FIDUCIAL-MICRO]  109.09,85.47 0 top
JP172  FIDUCIALUFIDUCIAL  [FIDUCIAL-MICRO]  85.34,109.22 0 top
JP173  FIDUCIALUFIDUCIAL  [FIDUCIAL-MICRO]  85.34,109.22 0 bottom
JP174  FIDUCIALUFIDUCIAL  [FIDUCIAL-MICRO]  109.09,85.47 0 bottom
JP175  STAND-OFF  [STAND-OFF]  87.12,87.12 0 top
JP176  STAND-OFF  [STAND-OFF]  107.44,87.12 0 top
JP177  STAND-OFF  [STAND-OFF]  113.03,107.44 0 top
JP178  STAND-OFF  [STAND-OFF]  133.35,107.44 0 top
JP179  FIDUCIALUFIDUCIAL  [FIDUCIAL-MICRO]  135,85.47 0 top
JP180  FIDUCIALUFIDUCIAL  [FIDUCIAL-MICRO]  111.25,109.22 0 top
JP181  FIDUCIALUFIDUCIAL  [FIDUCIAL-MICRO]  111.25,109.22 0 bottom
JP182  FIDUCIALUFIDUCIAL  [FIDUCIAL-MICRO]  135,85.47 0 bottom
JP183  STAND-OFF  [STAND-OFF]  113.03,87.12 0 top
JP184  STAND-OFF  [STAND-OFF]  133.35,87.12 0 top
JP185  STAND-OFF  [STAND-OFF]  138.94,107.44 0 top
JP186  STAND-OFF  [STAND-OFF]  159.26,107.44 0 top
JP187  FIDUCIALUFIDUCIAL  [FIDUCIAL-MICRO]  160.91,85.47 0 top
JP188  FIDUCIALUFIDUCIAL  [FIDUCIAL-MICRO]  137.16,109.22 0 top
JP189  FIDUCIALUFIDUCIAL  [FIDUCIAL-MICRO]  137.16,109.22 0 bottom
JP190  FIDUCIALUFIDUCIAL  [FIDUCIAL-MICRO]  160.91,85.47 0 bottom
JP191  STAND-OFF  [STAND-OFF]  138.94,87.12 0 top
JP192  STAND-OFF  [STAND-OFF]  159.26,87.12 0 top
LOGO1  OSHW-LOGOMINI  [OSHW-LOGO-MINI]  29.72,13.21 0 bottom
LOGO2  SFE_LOGO_NAME.1_INCH  [SFE_LOGO_NAME_.1]  19.56,20.83 0 bottom
LOGO3  SFE_LOGO_FLAME.1_INCH  [SFE_LOGO_FLAME_.1]  29.72,25.91 0 top
LOGO4  QWIIC_LOGO_4MM  [QWIIC_4MM]  29.72,14.48 0 top
LOGO5  OSHW-LOGOMINI  [OSHW-LOGO-MINI]  55.63,13.21 0 bottom
LOGO6  SFE_LOGO_NAME.1_INCH  [SFE_LOGO_NAME_.1]  45.47,20.83 0 bottom
LOGO7  SFE_LOGO_FLAME.1_INCH  [SFE_LOGO_FLAME_.1]  55.63,25.91 0 top
LOGO8  QWIIC_LOGO_4MM  [QWIIC_4MM]  55.63,14.48 0 top
LOGO9  OSHW-LOGOMINI  [OSHW-LOGO-MINI]  81.53,13.21 0 bottom
LOGO10  SFE_LOGO_NAME.1_INCH  [SFE_LOGO_NAME_.1]  71.37,20.83 0 bottom
LOGO11  SFE_LOGO_FLAME.1_INCH  [SFE_LOGO_FLAME_.1]  81.53,25.91 0 top
LOGO12  QWIIC_LOGO_4MM  [QWIIC_4MM]  81.53,14.48 0 top
LOGO13  OSHW-LOGOMINI  [OSHW-LOGO-MINI]  107.44,13.21 0 bottom
LOGO14  SFE_LOGO_NAME.1_INCH  [SFE_LOGO_NAME_.1]  97.28,20.83 0 bottom
LOGO15  SFE_LOGO_FLAME.1_INCH  [SFE_LOGO_FLAME_.1]  107.44,25.91 0 top
LOGO16  QWIIC_LOGO_4MM  [QWIIC_4MM]  107.44,14.48 0 top
LOGO17  OSHW-LOGOMINI  [OSHW-LOGO-MINI]  133.35,13.21 0 bottom
LOGO18  SFE_LOGO_NAME.1_INCH  [SFE_LOGO_NAME_.1]  123.19,20.83 0 bottom
LOGO19  SFE_LOGO_FLAME.1_INCH  [SFE_LOGO_FLAME_.1]  133.35,25.91 0 top
LOGO20  QWIIC_LOGO_4MM  [QWIIC_4MM]  133.35,14.48 0 top
LOGO21  OSHW-LOGOMINI  [OSHW-LOGO-MINI]  159.26,13.21 0 bottom
LOGO22  SFE_LOGO_NAME.1_INCH  [SFE_LOGO_NAME_.1]  149.1,20.83 0 bottom
LOGO23  SFE_LOGO_FLAME.1_INCH  [SFE_LOGO_FLAME_.1]  159.26,25.91 0 top
LOGO24  QWIIC_LOGO_4MM  [QWIIC_4MM]  159.26,14.48 0 top
LOGO25  OSHW-LOGOMINI  [OSHW-LOGO-MINI]  29.72,39.12 0 bottom
LOGO26  SFE_LOGO_NAME.1_INCH  [SFE_LOGO_NAME_.1]  19.56,46.74 0 bottom
LOGO27  SFE_LOGO_FLAME.1_INCH  [SFE_LOGO_FLAME_.1]  29.72,51.82 0 top
LOGO28  QWIIC_LOGO_4MM  [QWIIC_4MM]  29.72,40.39 0 top
LOGO29  OSHW-LOGOMINI  [OSHW-LOGO-MINI]  55.63,39.12 0 bottom
LOGO30  SFE_LOGO_NAME.1_INCH  [SFE_LOGO_NAME_.1]  45.47,46.74 0 bottom
LOGO31  SFE_LOGO_FLAME.1_INCH  [SFE_LOGO_FLAME_.1]  55.63,51.82 0 top
LOGO32  QWIIC_LOGO_4MM  [QWIIC_4MM]  55.63,40.39 0 top
LOGO33  OSHW-LOGOMINI  [OSHW-LOGO-MINI]  81.53,39.12 0 bottom
LOGO34  SFE_LOGO_NAME.1_INCH  [SFE_LOGO_NAME_.1]  71.37,46.74 0 bottom
LOGO35  SFE_LOGO_FLAME.1_INCH  [SFE_LOGO_FLAME_.1]  81.53,51.82 0 top
LOGO36  QWIIC_LOGO_4MM  [QWIIC_4MM]  81.53,40.39 0 top
LOGO37  OSHW-LOGOMINI  [OSHW-LOGO-MINI]  107.44,39.12 0 bottom
LOGO38  SFE_LOGO_NAME.1_INCH  [SFE_LOGO_NAME_.1]  97.28,46.74 0 bottom
LOGO39  SFE_LOGO_FLAME.1_INCH  [SFE_LOGO_FLAME_.1]  107.44,51.82 0 top
LOGO40  QWIIC_LOGO_4MM  [QWIIC_4MM]  107.44,40.39 0 top
LOGO41  OSHW-LOGOMINI  [OSHW-LOGO-MINI]  133.35,39.12 0 bottom
LOGO42  SFE_LOGO_NAME.1_INCH  [SFE_LOGO_NAME_.1]  123.19,46.74 0 bottom
LOGO43  SFE_LOGO_FLAME.1_INCH  [SFE_LOGO_FLAME_.1]  133.35,51.82 0 top
LOGO44  QWIIC_LOGO_4MM  [QWIIC_4MM]  133.35,40.39 0 top
LOGO45  OSHW-LOGOMINI  [OSHW-LOGO-MINI]  159.26,39.12 0 bottom
LOGO46  SFE_LOGO_NAME.1_INCH  [SFE_LOGO_NAME_.1]  149.1,46.74 0 bottom
LOGO47  SFE_LOGO_FLAME.1_INCH  [SFE_LOGO_FLAME_.1]  159.26,51.82 0 top
LOGO48  QWIIC_LOGO_4MM  [QWIIC_4MM]  159.26,40.39 0 top
LOGO49  OSHW-LOGOMINI  [OSHW-LOGO-MINI]  29.72,65.02 0 bottom
LOGO50  SFE_LOGO_NAME.1_INCH  [SFE_LOGO_NAME_.1]  19.56,72.64 0 bottom
LOGO51  SFE_LOGO_FLAME.1_INCH  [SFE_LOGO_FLAME_.1]  29.72,77.72 0 top
LOGO52  QWIIC_LOGO_4MM  [QWIIC_4MM]  29.72,66.29 0 top
LOGO53  OSHW-LOGOMINI  [OSHW-LOGO-MINI]  55.63,65.02 0 bottom
LOGO54  SFE_LOGO_NAME.1_INCH  [SFE_LOGO_NAME_.1]  45.47,72.64 0 bottom
LOGO55  SFE_LOGO_FLAME.1_INCH  [SFE_LOGO_FLAME_.1]  55.63,77.72 0 top
LOGO56  QWIIC_LOGO_4MM  [QWIIC_4MM]  55.63,66.29 0 top
LOGO57  OSHW-LOGOMINI  [OSHW-LOGO-MINI]  81.53,65.02 0 bottom
LOGO58  SFE_LOGO_NAME.1_INCH  [SFE_LOGO_NAME_.1]  71.37,72.64 0 bottom
LOGO59  SFE_LOGO_FLAME.1_INCH  [SFE_LOGO_FLAME_.1]  81.53,77.72 0 top
LOGO60  QWIIC_LOGO_4MM  [QWIIC_4MM]  81.53,66.29 0 top
LOGO61  OSHW-LOGOMINI  [OSHW-LOGO-MINI]  107.44,65.02 0 bottom
LOGO62  SFE_LOGO_NAME.1_INCH  [SFE_LOGO_NAME_.1]  97.28,72.64 0 bottom
LOGO63  SFE_LOGO_FLAME.1_INCH  [SFE_LOGO_FLAME_.1]  107.44,77.72 0 top
LOGO64  QWIIC_LOGO_4MM  [QWIIC_4MM]  107.44,66.29 0 top
LOGO65  OSHW-LOGOMINI  [OSHW-LOGO-MINI]  133.35,65.02 0 bottom
LOGO66  SFE_LOGO_NAME.1_INCH  [SFE_LOGO_NAME_.1]  123.19,72.64 0 bottom
LOGO67  SFE_LOGO_FLAME.1_INCH  [SFE_LOGO_FLAME_.1]  133.35,77.72 0 top
LOGO68  QWIIC_LOGO_4MM  [QWIIC_4MM]  133.35,66.29 0 top
LOGO69  OSHW-LOGOMINI  [OSHW-LOGO-MINI]  159.26,65.02 0 bottom
LOGO70  SFE_LOGO_NAME.1_INCH  [SFE_LOGO_NAME_.1]  149.1,72.64 0 bottom
LOGO71  SFE_LOGO_FLAME.1_INCH  [SFE_LOGO_FLAME_.1]  159.26,77.72 0 top
LOGO72  QWIIC_LOGO_4MM  [QWIIC_4MM]  159.26,66.29 0 top
LOGO73  OSHW-LOGOMINI  [OSHW-LOGO-MINI]  29.72,90.93 0 bottom
LOGO74  SFE_LOGO_NAME.1_INCH  [SFE_LOGO_NAME_.1]  19.56,98.55 0 bottom
LOGO75  SFE_LOGO_FLAME.1_INCH  [SFE_LOGO_FLAME_.1]  29.72,103.63 0 top
LOGO76  QWIIC_LOGO_4MM  [QWIIC_4MM]  29.72,92.2 0 top
LOGO77  OSHW-LOGOMINI  [OSHW-LOGO-MINI]  55.63,90.93 0 bottom
LOGO78  SFE_LOGO_NAME.1_INCH  [SFE_LOGO_NAME_.1]  45.47,98.55 0 bottom
LOGO79  SFE_LOGO_FLAME.1_INCH  [SFE_LOGO_FLAME_.1]  55.63,103.63 0 top
LOGO80  QWIIC_LOGO_4MM  [QWIIC_4MM]  55.63,92.2 0 top
LOGO81  OSHW-LOGOMINI  [OSHW-LOGO-MINI]  81.53,90.93 0 bottom
LOGO82  SFE_LOGO_NAME.1_INCH  [SFE_LOGO_NAME_.1]  71.37,98.55 0 bottom
LOGO83  SFE_LOGO_FLAME.1_INCH  [SFE_LOGO_FLAME_.1]  81.53,103.63 0 top
LOGO84  QWIIC_LOGO_4MM  [QWIIC_4MM]  81.53,92.2 0 top
LOGO85  OSHW-LOGOMINI  [OSHW-LOGO-MINI]  107.44,90.93 0 bottom
LOGO86  SFE_LOGO_NAME.1_INCH  [SFE_LOGO_NAME_.1]  97.28,98.55 0 bottom
LOGO87  SFE_LOGO_FLAME.1_INCH  [SFE_LOGO_FLAME_.1]  107.44,103.63 0 top
LOGO88  QWIIC_LOGO_4MM  [QWIIC_4MM]  107.44,92.2 0 top
LOGO89  OSHW-LOGOMINI  [OSHW-LOGO-MINI]  133.35,90.93 0 bottom
LOGO90  SFE_LOGO_NAME.1_INCH  [SFE_LOGO_NAME_.1]  123.19,98.55 0 bottom
LOGO91  SFE_LOGO_FLAME.1_INCH  [SFE_LOGO_FLAME_.1]  133.35,103.63 0 top
LOGO92  QWIIC_LOGO_4MM  [QWIIC_4MM]  133.35,92.2 0 top
LOGO93  OSHW-LOGOMINI  [OSHW-LOGO-MINI]  159.26,90.93 0 bottom
LOGO94  SFE_LOGO_NAME.1_INCH  [SFE_LOGO_NAME_.1]  149.1,98.55 0 bottom
LOGO95  SFE_LOGO_FLAME.1_INCH  [SFE_LOGO_FLAME_.1]  159.26,103.63 0 top
LOGO96  QWIIC_LOGO_4MM  [QWIIC_4MM]  159.26,92.2 0 top
POWER  JUMPER-SMT_2_NC_TRACE_SILK  [SMT-JUMPER_2_NC_TRACE_SILK]  9.4,25.91 0 bottom
POWER1  JUMPER-SMT_2_NC_TRACE_SILK  [SMT-JUMPER_2_NC_TRACE_SILK]  35.31,25.91 0 bottom
POWER2  JUMPER-SMT_2_NC_TRACE_SILK  [SMT-JUMPER_2_NC_TRACE_SILK]  61.21,25.91 0 bottom
POWER3  JUMPER-SMT_2_NC_TRACE_SILK  [SMT-JUMPER_2_NC_TRACE_SILK]  87.12,25.91 0 bottom
POWER4  JUMPER-SMT_2_NC_TRACE_SILK  [SMT-JUMPER_2_NC_TRACE_SILK]  113.03,25.91 0 bottom
POWER5  JUMPER-SMT_2_NC_TRACE_SILK  [SMT-JUMPER_2_NC_TRACE_SILK]  138.94,25.91 0 bottom
POWER6  JUMPER-SMT_2_NC_TRACE_SILK  [SMT-JUMPER_2_NC_TRACE_SILK]  9.4,51.82 0 bottom
POWER7  JUMPER-SMT_2_NC_TRACE_SILK  [SMT-JUMPER_2_NC_TRACE_SILK]  35.31,51.82 0 bottom
POWER8  JUMPER-SMT_2_NC_TRACE_SILK  [SMT-JUMPER_2_NC_TRACE_SILK]  61.21,51.82 0 bottom
POWER9  JUMPER-SMT_2_NC_TRACE_SILK  [SMT-JUMPER_2_NC_TRACE_SILK]  87.12,51.82 0 bottom
POWER10  JUMPER-SMT_2_NC_TRACE_SILK  [SMT-JUMPER_2_NC_TRACE_SILK]  113.03,51.82 0 bottom
POWER11  JUMPER-SMT_2_NC_TRACE_SILK  [SMT-JUMPER_2_NC_TRACE_SILK]  138.94,51.82 0 bottom
POWER12  JUMPER-SMT_2_NC_TRACE_SILK  [SMT-JUMPER_2_NC_TRACE_SILK]  9.4,77.72 0 bottom
POWER13  JUMPER-SMT_2_NC_TRACE_SILK  [SMT-JUMPER_2_NC_TRACE_SILK]  35.31,77.72 0 bottom
POWER14  JUMPER-SMT_2_NC_TRACE_SILK  [SMT-JUMPER_2_NC_TRACE_SILK]  61.21,77.72 0 bottom
POWER15  JUMPER-SMT_2_NC_TRACE_SILK  [SMT-JUMPER_2_NC_TRACE_SILK]  87.12,77.72 0 bottom
POWER16  JUMPER-SMT_2_NC_TRACE_SILK  [SMT-JUMPER_2_NC_TRACE_SILK]  113.03,77.72 0 bottom
POWER17  JUMPER-SMT_2_NC_TRACE_SILK  [SMT-JUMPER_2_NC_TRACE_SILK]  138.94,77.72 0 bottom
POWER18  JUMPER-SMT_2_NC_TRACE_SILK  [SMT-JUMPER_2_NC_TRACE_SILK]  9.4,103.63 0 bottom
POWER19  JUMPER-SMT_2_NC_TRACE_SILK  [SMT-JUMPER_2_NC_TRACE_SILK]  35.31,103.63 0 bottom
POWER20  JUMPER-SMT_2_NC_TRACE_SILK  [SMT-JUMPER_2_NC_TRACE_SILK]  61.21,103.63 0 bottom
POWER21  JUMPER-SMT_2_NC_TRACE_SILK  [SMT-JUMPER_2_NC_TRACE_SILK]  87.12,103.63 0 bottom
POWER22  JUMPER-SMT_2_NC_TRACE_SILK  [SMT-JUMPER_2_NC_TRACE_SILK]  113.03,103.63 0 bottom
POWER23  JUMPER-SMT_2_NC_TRACE_SILK  [SMT-JUMPER_2_NC_TRACE_SILK]  138.94,103.63 0 bottom
R1  100k  [0603]  14.22,13.72 0 top
R2  100k  [0603]  17.78,13.72 0 top
R3  1k  [0603]  12.7,25.91 0 top
R4  4.7k  [0603]  18.29,24.64 90 top
R5  4.7k  [0603]  20.83,24.64 90 top
R6  100k  [0603]  21.34,13.72 0 top
R7  100k  [0603]  24.89,13.72 180 top
R8  4.7k  [0603]  44.2,24.64 90 top
R9  4.7k  [0603]  46.74,24.64 90 top
R10  1k  [0603]  38.61,25.91 0 top
R11  100k  [0603]  40.13,13.72 0 top
R12  100k  [0603]  43.69,13.72 0 top
R13  100k  [0603]  47.24,13.72 0 top
R14  100k  [0603]  50.8,13.72 180 top
R15  4.7k  [0603]  70.1,24.64 90 top
R16  4.7k  [0603]  72.64,24.64 90 top
R17  1k  [0603]  64.52,25.91 0 top
R18  100k  [0603]  66.04,13.72 0 top
R19  100k  [0603]  69.6,13.72 0 top
R20  100k  [0603]  73.15,13.72 0 top
R21  100k  [0603]  76.71,13.72 180 top
R22  4.7k  [0603]  96.01,24.64 90 top
R23  4.7k  [0603]  98.55,24.64 90 top
R24  1k  [0603]  90.42,25.91 0 top
R25  100k  [0603]  91.95,13.72 0 top
R26  100k  [0603]  95.5,13.72 0 top
R27  100k  [0603]  99.06,13.72 0 top
R28  100k  [0603]  102.62,13.72 180 top
R29  4.7k  [0603]  121.92,24.64 90 top
R30  4.7k  [0603]  124.46,24.64 90 top
R31  1k  [0603]  116.33,25.91 0 top
R32  100k  [0603]  117.86,13.72 0 top
R33  100k  [0603]  121.41,13.72 0 top
R34  100k  [0603]  124.97,13.72 0 top
R35  100k  [0603]  128.52,13.72 180 top
R36  4.7k  [0603]  147.83,24.64 90 top
R37  4.7k  [0603]  150.37,24.64 90 top
R38  1k  [0603]  142.24,25.91 0 top
R39  100k  [0603]  143.76,13.72 0 top
R40  100k  [0603]  147.32,13.72 0 top
R41  100k  [0603]  150.88,13.72 0 top
R42  100k  [0603]  154.43,13.72 180 top
R43  4.7k  [0603]  18.29,50.55 90 top
R44  4.7k  [0603]  20.83,50.55 90 top
R45  1k  [0603]  12.7,51.82 0 top
R46  100k  [0603]  14.22,39.62 0 top
R47  100k  [0603]  17.78,39.62 0 top
R48  100k  [0603]  21.34,39.62 0 top
R49  100k  [0603]  24.89,39.62 180 top
R50  4.7k  [0603]  44.2,50.55 90 top
R51  4.7k  [0603]  46.74,50.55 90 top
R52  1k  [0603]  38.61,51.82 0 top
R53  100k  [0603]  40.13,39.62 0 top
R54  100k  [0603]  43.69,39.62 0 top
R55  100k  [0603]  47.24,39.62 0 top
R56  100k  [0603]  50.8,39.62 180 top
R57  4.7k  [0603]  70.1,50.55 90 top
R58  4.7k  [0603]  72.64,50.55 90 top
R59  1k  [0603]  64.52,51.82 0 top
R60  100k  [0603]  66.04,39.62 0 top
R61  100k  [0603]  69.6,39.62 0 top
R62  100k  [0603]  73.15,39.62 0 top
R63  100k  [0603]  76.71,39.62 180 top
R64  4.7k  [0603]  96.01,50.55 90 top
R65  4.7k  [0603]  98.55,50.55 90 top
R66  1k  [0603]  90.42,51.82 0 top
R67  100k  [0603]  91.95,39.62 0 top
R68  100k  [0603]  95.5,39.62 0 top
R69  100k  [0603]  99.06,39.62 0 top
R70  100k  [0603]  102.62,39.62 180 top
R71  4.7k  [0603]  121.92,50.55 90 top
R72  4.7k  [0603]  124.46,50.55 90 top
R73  1k  [0603]  116.33,51.82 0 top
R74  100k  [0603]  117.86,39.62 0 top
R75  100k  [0603]  121.41,39.62 0 top
R76  100k  [0603]  124.97,39.62 0 top
R77  100k  [0603]  128.52,39.62 180 top
R78  4.7k  [0603]  147.83,50.55 90 top
R79  4.7k  [0603]  150.37,50.55 90 top
R80  1k  [0603]  142.24,51.82 0 top
R81  100k  [0603]  143.76,39.62 0 top
R82  100k  [0603]  147.32,39.62 0 top
R83  100k  [0603]  150.88,39.62 0 top
R84  100k  [0603]  154.43,39.62 180 top
R85  4.7k  [0603]  18.29,76.45 90 top
R86  4.7k  [0603]  20.83,76.45 90 top
R87  1k  [0603]  12.7,77.72 0 top
R88  100k  [0603]  14.22,65.53 0 top
R89  100k  [0603]  17.78,65.53 0 top
R90  100k  [0603]  21.34,65.53 0 top
R91  100k  [0603]  24.89,65.53 180 top
R92  4.7k  [0603]  44.2,76.45 90 top
R93  4.7k  [0603]  46.74,76.45 90 top
R94  1k  [0603]  38.61,77.72 0 top
R95  100k  [0603]  40.13,65.53 0 top
R96  100k  [0603]  43.69,65.53 0 top
R97  100k  [0603]  47.24,65.53 0 top
R98  100k  [0603]  50.8,65.53 180 top
R99  4.7k  [0603]  70.1,76.45 90 top
R100  4.7k  [0603]  72.64,76.45 90 top
R101  1k  [0603]  64.52,77.72 0 top
R102  100k  [0603]  66.04,65.53 0 top
R103  100k  [0603]  69.6,65.53 0 top
R104  100k  [0603]  73.15,65.53 0 top
R105  100k  [0603]  76.71,65.53 180 top
R106  4.7k  [0603]  96.01,76.45 90 top
R107  4.7k  [0603]  98.55,76.45 90 top
R108  1k  [0603]  90.42,77.72 0 top
R109  100k  [0603]  91.95,65.53 0 top
R110  100k  [0603]  95.5,65.53 0 top
R111  100k  [0603]  99.06,65.53 0 top
R112  100k  [0603]  102.62,65.53 180 top
R113  4.7k  [0603]  121.92,76.45 90 top
R114  4.7k  [0603]  124.46,76.45 90 top
R115  1k  [0603]  116.33,77.72 0 top
R116  100k  [0603]  117.86,65.53 0 top
R117  100k  [0603]  121.41,65.53 0 top
R118  100k  [0603]  124.97,65.53 0 top
R119  100k  [0603]  128.52,65.53 180 top
R120  4.7k  [0603]  147.83,76.45 90 top
R121  4.7k  [0603]  150.37,76.45 90 top
R122  1k  [0603]  142.24,77.72 0 top
R123  100k  [0603]  143.76,65.53 0 top
R124  100k  [0603]  147.32,65.53 0 top
R125  100k  [0603]  150.88,65.53 0 top
R126  100k  [0603]  154.43,65.53 180 top
R127  4.7k  [0603]  18.29,102.36 90 top
R128  4.7k  [0603]  20.83,102.36 90 top
R129  1k  [0603]  12.7,103.63 0 top
R130  100k  [0603]  14.22,91.44 0 top
R131  100k  [0603]  17.78,91.44 0 top
R132  100k  [0603]  21.34,91.44 0 top
R133  100k  [0603]  24.89,91.44 180 top
R134  4.7k  [0603]  44.2,102.36 90 top
R135  4.7k  [0603]  46.74,102.36 90 top
R136  1k  [0603]  38.61,103.63 0 top
R137  100k  [0603]  40.13,91.44 0 top
R138  100k  [0603]  43.69,91.44 0 top
R139  100k  [0603]  47.24,91.44 0 top
R140  100k  [0603]  50.8,91.44 180 top
R141  4.7k  [0603]  70.1,102.36 90 top
R142  4.7k  [0603]  72.64,102.36 90 top
R143  1k  [0603]  64.52,103.63 0 top
R144  100k  [0603]  66.04,91.44 0 top
R145  100k  [0603]  69.6,91.44 0 top
R146  100k  [0603]  73.15,91.44 0 top
R147  100k  [0603]  76.71,91.44 180 top
R148  4.7k  [0603]  96.01,102.36 90 top
R149  4.7k  [0603]  98.55,102.36 90 top
R150  1k  [0603]  90.42,103.63 0 top
R151  100k  [0603]  91.95,91.44 0 top
R152  100k  [0603]  95.5,91.44 0 top
R153  100k  [0603]  99.06,91.44 0 top
R154  100k  [0603]  102.62,91.44 180 top
R155  4.7k  [0603]  121.92,102.36 90 top
R156  4.7k  [0603]  124.46,102.36 90 top
R157  1k  [0603]  116.33,103.63 0 top
R158  100k  [0603]  117.86,91.44 0 top
R159  100k  [0603]  121.41,91.44 0 top
R160  100k  [0603]  124.97,91.44 0 top
R161  100k  [0603]  128.52,91.44 180 top
R162  4.7k  [0603]  147.83,102.36 90 top
R163  4.7k  [0603]  150.37,102.36 90 top
R164  1k  [0603]  142.24,103.63 0 top
R165  100k  [0603]  143.76,91.44 0 top
R166  100k  [0603]  147.32,91.44 0 top
R167  100k  [0603]  150.88,91.44 0 top
R168  100k  [0603]  154.43,91.44 180 top
U1  RM24C512C  [SO08]  19.56,19.56 90 top
U2  RM24C512C  [SO08]  45.47,19.56 90 top
U3  RM24C512C  [SO08]  71.37,19.56 90 top
U4  RM24C512C  [SO08]  97.28,19.56 90 top
U5  RM24C512C  [SO08]  123.19,19.56 90 top
U6  RM24C512C  [SO08]  149.1,19.56 90 top
U7  RM24C512C  [SO08]  19.56,45.47 90 top
U8  RM24C512C  [SO08]  45.47,45.47 90 top
U9  RM24C512C  [SO08]  71.37,45.47 90 top
U10  RM24C512C  [SO08]  97.28,45.47 90 top
U11  RM24C512C  [SO08]  123.19,45.47 90 top
U12  RM24C512C  [SO08]  149.1,45.47 90 top
U13  RM24C512C  [SO08]  19.56,71.37 90 top
U14  RM24C512C  [SO08]  45.47,71.37 90 top
U15  RM24C512C  [SO08]  71.37,71.37 90 top
U16  RM24C512C  [SO08]  97.28,71.37 90 top
U17  RM24C512C  [SO08]  123.19,71.37 90 top
U18  RM24C512C  [SO08]  149.1,71.37 90 top
U19  RM24C512C  [SO08]  19.56,97.28 90 top
U20  RM24C512C  [SO08]  45.47,97.28 90 top
U21  RM24C512C  [SO08]  71.37,97.28 90 top
U22  RM24C512C  [SO08]  97.28,97.28 90 top
U23  RM24C512C  [SO08]  123.19,97.28 90 top
U24  RM24C512C  [SO08]  149.1,97.28 90 top
U$1  [#WP#3]  14.48,8.51 90 top
U$2  [#WP#3]  14.48,8.51 90 bottom
U$3  [#WP#0]  12.95,13.21 0 bottom
U$4  [E00]  16,17.53 0 bottom
U$5  [E10]  21.08,17.53 0 bottom
U$6  [E20]  26.16,17.53 0 bottom
U$7  [00]  14.48,13.84 0 bottom
U$8  [00]  19.68,13.84 0 bottom
U$9  [00]  24.77,13.84 0 bottom
U$10  [#GND#0]  17.02,8.51 90 top
U$11  [(I_SUPER2_C)]  21.46,25.4 0 bottom
U$12  [PWR0]  6.86,24.26 0 top
U$13  [10]  26.67,13.84 0 bottom
U$14  [#GND#0]  17.02,8.51 90 bottom
U$15  [#3#3V#0]  19.56,8.51 90 top
U$16  [#3#3V#0]  19.56,8.51 90 bottom
U$17  [#SDA#0]  22.1,8.51 90 top
U$18  [#LED#2]  14.48,25.91 0 bottom
U$19  [QWIIC_EEPROM0]  13.72,30.35 0 top
U$20  [QWIIC_EEPROM0]  25.53,30.35 0 bottom
U$21  [10]  21.59,13.84 0 bottom
U$22  [10]  16.51,13.84 0 bottom
U$23  [BREAKOUT_#_512KBIT0]  12.06,29.08 0 top
U$24  [BREAKOUT_#_512KBIT0]  26.92,29.08 0 bottom
U$25  [DEFAULT_ADDR#_0X500]  27.56,19.05 0 bottom
U$26  [(I_SUPER2_C)]  47.37,25.4 0 bottom
U$27  [#GND#0]  42.93,8.51 90 top
U$28  [#GND#0]  42.93,8.51 90 bottom
U$29  [#SDA#0]  22.1,8.51 90 bottom
U$30  [#SCL#0]  24.64,8.51 90 top
U$31  [#SCL#0]  24.64,8.51 90 bottom
U$32  [#3#3V#0]  45.47,8.51 90 top
U$33  [#3#3V#0]  45.47,8.51 90 bottom
U$34  [#SDA#0]  48.01,8.51 90 top
U$35  [#SDA#0]  48.01,8.51 90 bottom
U$36  [#SCL#0]  50.55,8.51 90 top
U$37  [#SCL#0]  50.55,8.51 90 bottom
U$38  [E00]  41.91,17.53 0 bottom
U$39  [E10]  46.99,17.53 0 bottom
U$40  [E20]  52.07,17.53 0 bottom
U$41  [00]  40.39,13.84 0 bottom
U$42  [00]  45.59,13.84 0 bottom
U$43  [00]  50.67,13.84 0 bottom
U$44  [10]  52.58,13.84 0 bottom
U$45  [10]  47.5,13.84 0 bottom
U$46  [10]  42.42,13.84 0 bottom
U$47  [PWR0]  32.77,24.26 0 top
U$48  [QWIIC_EEPROM0]  39.62,30.35 0 top
U$49  [QWIIC_EEPROM0]  51.43,30.35 0 bottom
U$50  [BREAKOUT_#_512KBIT0]  37.97,29.08 0 top
U$51  [BREAKOUT_#_512KBIT0]  52.83,29.08 0 bottom
U$52  [#WP#0]  38.86,13.21 0 bottom
U$53  [#LED#2]  40.39,25.91 0 bottom
U$54  [#WP#3]  40.39,8.51 90 top
U$55  [#WP#3]  40.39,8.51 90 bottom
U$56  [DEFAULT_ADDR#_0X500]  53.47,19.05 0 bottom
U$57  [(I_SUPER2_C)]  73.28,25.4 0 bottom
U$58  [#GND#0]  68.83,8.51 90 top
U$59  [#GND#0]  68.83,8.51 90 bottom
U$60  [#3#3V#0]  71.37,8.51 90 top
U$61  [#3#3V#0]  71.37,8.51 90 bottom
U$62  [#SDA#0]  73.91,8.51 90 top
U$63  [#SDA#0]  73.91,8.51 90 bottom
U$64  [#SCL#0]  76.45,8.51 90 top
U$65  [#SCL#0]  76.45,8.51 90 bottom
U$66  [E00]  67.82,17.53 0 bottom
U$67  [E10]  72.9,17.53 0 bottom
U$68  [E20]  77.98,17.53 0 bottom
U$69  [00]  66.29,13.84 0 bottom
U$70  [00]  71.5,13.84 0 bottom
U$71  [00]  76.58,13.84 0 bottom
U$72  [10]  78.49,13.84 0 bottom
U$73  [10]  73.41,13.84 0 bottom
U$74  [10]  68.33,13.84 0 bottom
U$75  [PWR0]  58.67,24.26 0 top
U$76  [QWIIC_EEPROM0]  65.53,30.35 0 top
U$77  [QWIIC_EEPROM0]  77.34,30.35 0 bottom
U$78  [BREAKOUT_#_512KBIT0]  63.88,29.08 0 top
U$79  [BREAKOUT_#_512KBIT0]  78.74,29.08 0 bottom
U$80  [#WP#0]  64.77,13.21 0 bottom
U$81  [#LED#2]  66.29,25.91 0 bottom
U$82  [#WP#3]  66.29,8.51 90 top
U$83  [#WP#3]  66.29,8.51 90 bottom
U$84  [DEFAULT_ADDR#_0X500]  79.38,19.05 0 bottom
U$85  [(I_SUPER2_C)]  99.19,25.4 0 bottom
U$86  [#GND#0]  94.74,8.51 90 top
U$87  [#GND#0]  94.74,8.51 90 bottom
U$88  [#3#3V#0]  97.28,8.51 90 top
U$89  [#3#3V#0]  97.28,8.51 90 bottom
U$90  [#SDA#0]  99.82,8.51 90 top
U$91  [#SDA#0]  99.82,8.51 90 bottom
U$92  [#SCL#0]  102.36,8.51 90 top
U$93  [#SCL#0]  102.36,8.51 90 bottom
U$94  [E00]  93.73,17.53 0 bottom
U$95  [E10]  98.81,17.53 0 bottom
U$96  [E20]  103.89,17.53 0 bottom
U$97  [00]  92.2,13.84 0 bottom
U$98  [00]  97.41,13.84 0 bottom
U$99  [00]  102.49,13.84 0 bottom
U$100  [10]  104.39,13.84 0 bottom
U$101  [10]  99.31,13.84 0 bottom
U$102  [10]  94.23,13.84 0 bottom
U$103  [PWR0]  84.58,24.26 0 top
U$104  [QWIIC_EEPROM0]  91.44,30.35 0 top
U$105  [QWIIC_EEPROM0]  103.25,30.35 0 bottom
U$106  [BREAKOUT_#_512KBIT0]  89.79,29.08 0 top
U$107  [BREAKOUT_#_512KBIT0]  104.65,29.08 0 bottom
U$108  [#WP#0]  90.68,13.21 0 bottom
U$109  [#LED#2]  92.2,25.91 0 bottom
U$110  [#WP#3]  92.2,8.51 90 top
U$111  [#WP#3]  92.2,8.51 90 bottom
U$112  [DEFAULT_ADDR#_0X500]  105.28,19.05 0 bottom
U$113  [(I_SUPER2_C)]  125.09,25.4 0 bottom
U$114  [#GND#0]  120.65,8.51 90 top
U$115  [#GND#0]  120.65,8.51 90 bottom
U$116  [#3#3V#0]  123.19,8.51 90 top
U$117  [#3#3V#0]  123.19,8.51 90 bottom
U$118  [#SDA#0]  125.73,8.51 90 top
U$119  [#SDA#0]  125.73,8.51 90 bottom
U$120  [#SCL#0]  128.27,8.51 90 top
U$121  [#SCL#0]  128.27,8.51 90 bottom
U$122  [E00]  119.63,17.53 0 bottom
U$123  [E10]  124.71,17.53 0 bottom
U$124  [E20]  129.79,17.53 0 bottom
U$125  [00]  118.11,13.84 0 bottom
U$126  [00]  123.32,13.84 0 bottom
U$127  [00]  128.4,13.84 0 bottom
U$128  [10]  130.3,13.84 0 bottom
U$129  [10]  125.22,13.84 0 bottom
U$130  [10]  120.14,13.84 0 bottom
U$131  [PWR0]  110.49,24.26 0 top
U$132  [QWIIC_EEPROM0]  117.35,30.35 0 top
U$133  [QWIIC_EEPROM0]  129.16,30.35 0 bottom
U$134  [BREAKOUT_#_512KBIT0]  115.7,29.08 0 top
U$135  [BREAKOUT_#_512KBIT0]  130.56,29.08 0 bottom
U$136  [#WP#0]  116.59,13.21 0 bottom
U$137  [#LED#2]  118.11,25.91 0 bottom
U$138  [#WP#3]  118.11,8.51 90 top
U$139  [#WP#3]  118.11,8.51 90 bottom
U$140  [DEFAULT_ADDR#_0X500]  131.19,19.05 0 bottom
U$141  [(I_SUPER2_C)]  151,25.4 0 bottom
U$142  [#GND#0]  146.56,8.51 90 top
U$143  [#GND#0]  146.56,8.51 90 bottom
U$144  [#3#3V#0]  149.1,8.51 90 top
U$145  [#3#3V#0]  149.1,8.51 90 bottom
U$146  [#SDA#0]  151.64,8.51 90 top
U$147  [#SDA#0]  151.64,8.51 90 bottom
U$148  [#SCL#0]  154.18,8.51 90 top
U$149  [#SCL#0]  154.18,8.51 90 bottom
U$150  [E00]  145.54,17.53 0 bottom
U$151  [E10]  150.62,17.53 0 bottom
U$152  [E20]  155.7,17.53 0 bottom
U$153  [00]  144.02,13.84 0 bottom
U$154  [00]  149.22,13.84 0 bottom
U$155  [00]  154.31,13.84 0 bottom
U$156  [10]  156.21,13.84 0 bottom
U$157  [10]  151.13,13.84 0 bottom
U$158  [10]  146.05,13.84 0 bottom
U$159  [PWR0]  136.4,24.26 0 top
U$160  [QWIIC_EEPROM0]  143.26,30.35 0 top
U$161  [QWIIC_EEPROM0]  155.07,30.35 0 bottom
U$162  [BREAKOUT_#_512KBIT0]  141.61,29.08 0 top
U$163  [BREAKOUT_#_512KBIT0]  156.46,29.08 0 bottom
U$164  [#WP#0]  142.49,13.21 0 bottom
U$165  [#LED#2]  144.02,25.91 0 bottom
U$166  [#WP#3]  144.02,8.51 90 top
U$167  [#WP#3]  144.02,8.51 90 bottom
U$168  [DEFAULT_ADDR#_0X500]  157.1,19.05 0 bottom
U$169  [(I_SUPER2_C)]  21.46,51.31 0 bottom
U$170  [#GND#0]  17.02,34.42 90 top
U$171  [#GND#0]  17.02,34.42 90 bottom
U$172  [#3#3V#0]  19.56,34.42 90 top
U$173  [#3#3V#0]  19.56,34.42 90 bottom
U$174  [#SDA#0]  22.1,34.42 90 top
U$175  [#SDA#0]  22.1,34.42 90 bottom
U$176  [#SCL#0]  24.64,34.42 90 top